# EAGLE board 4bit Logic Unit (EAGLE 8.4.3)
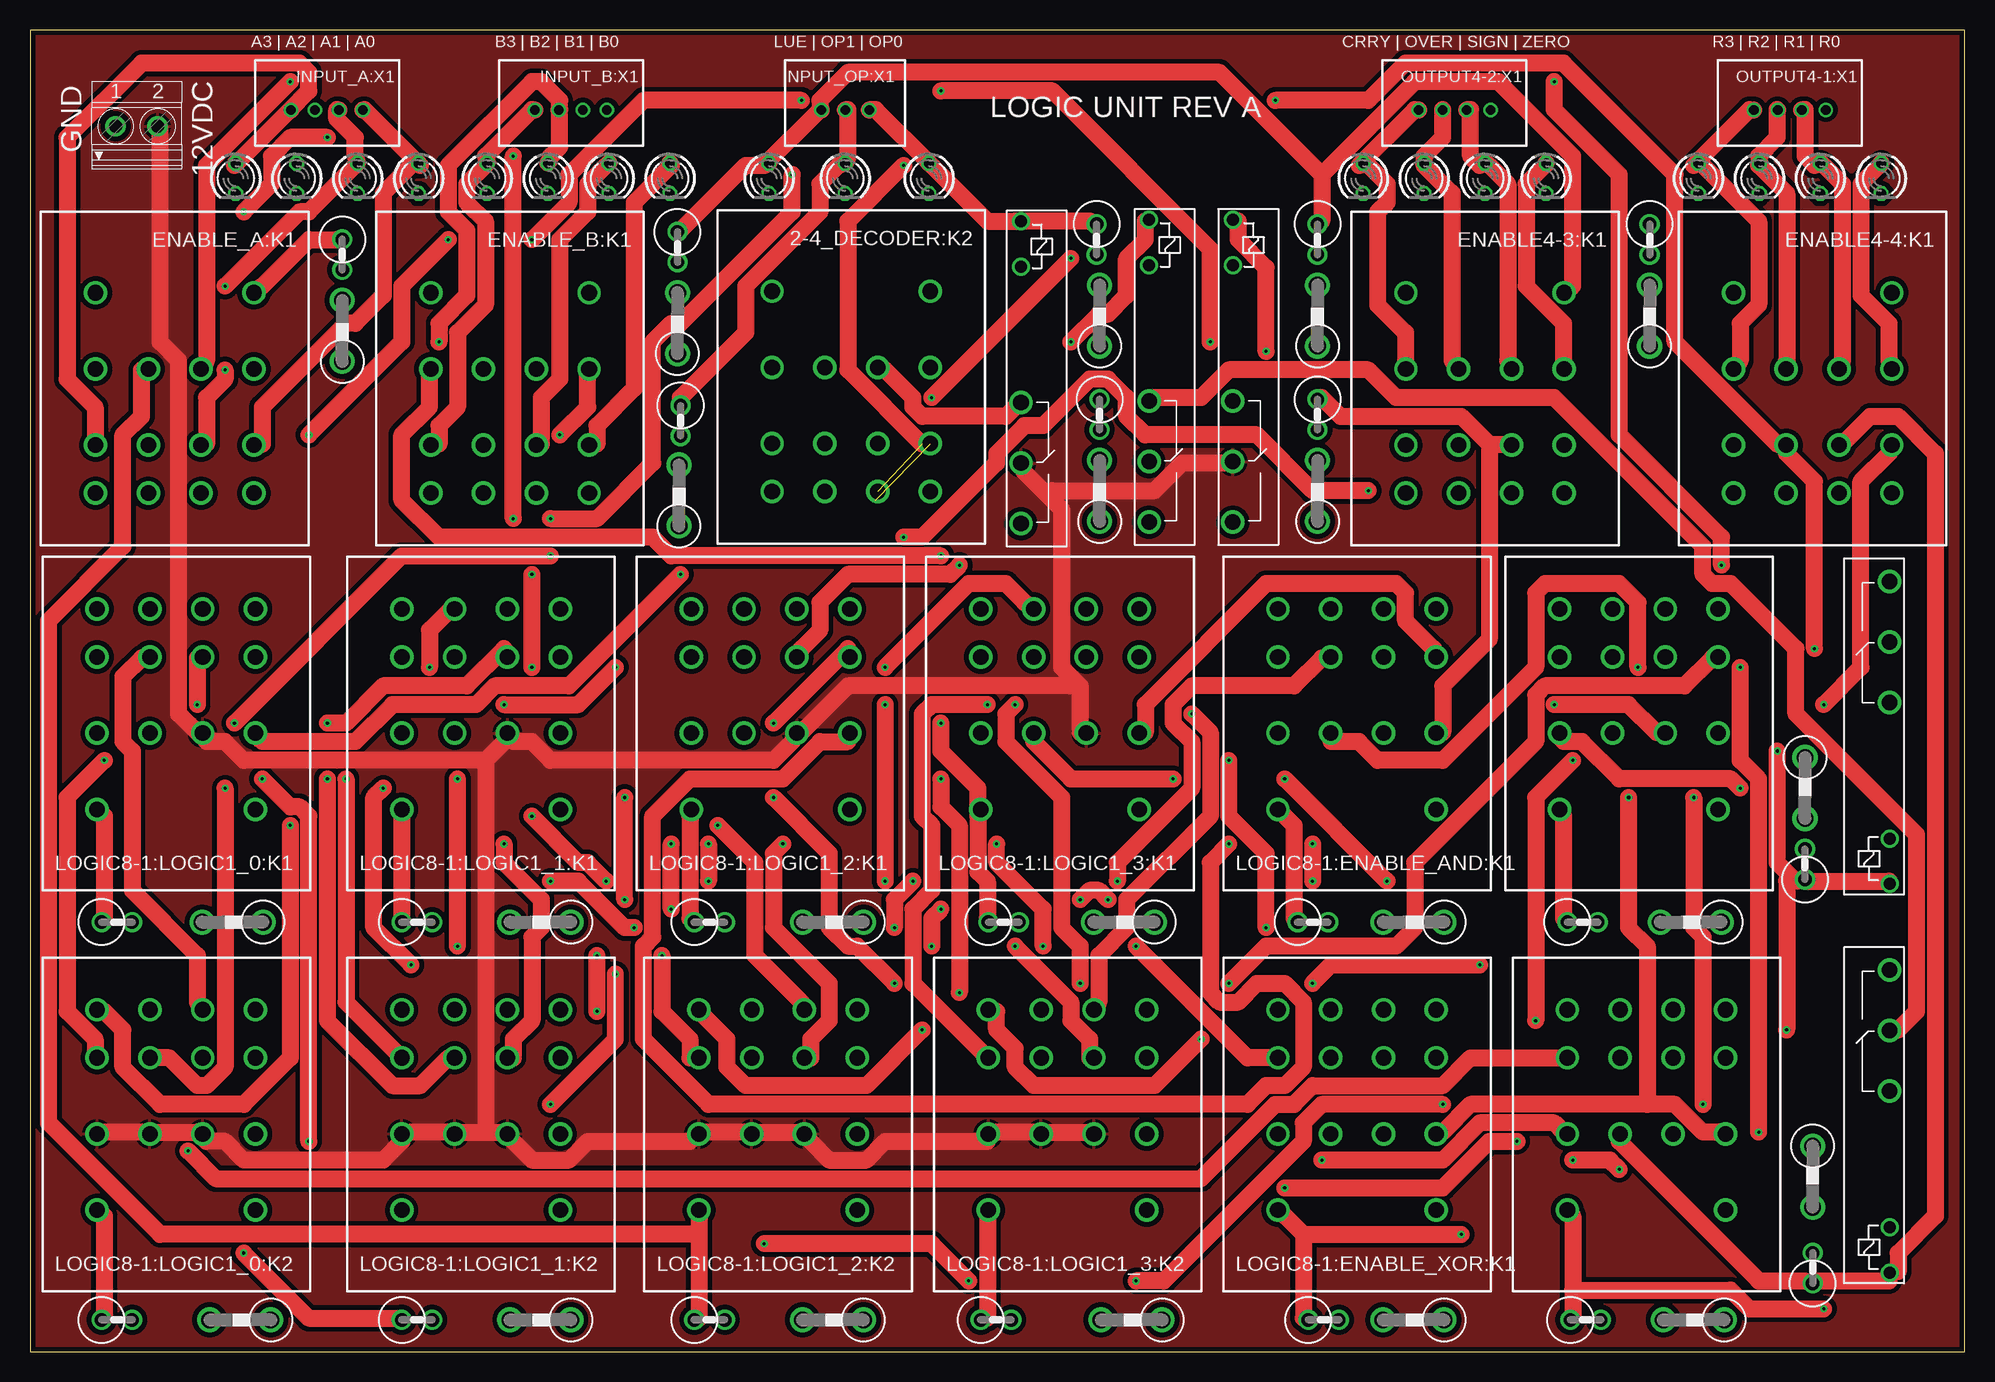
[diagram p0: board, top side]
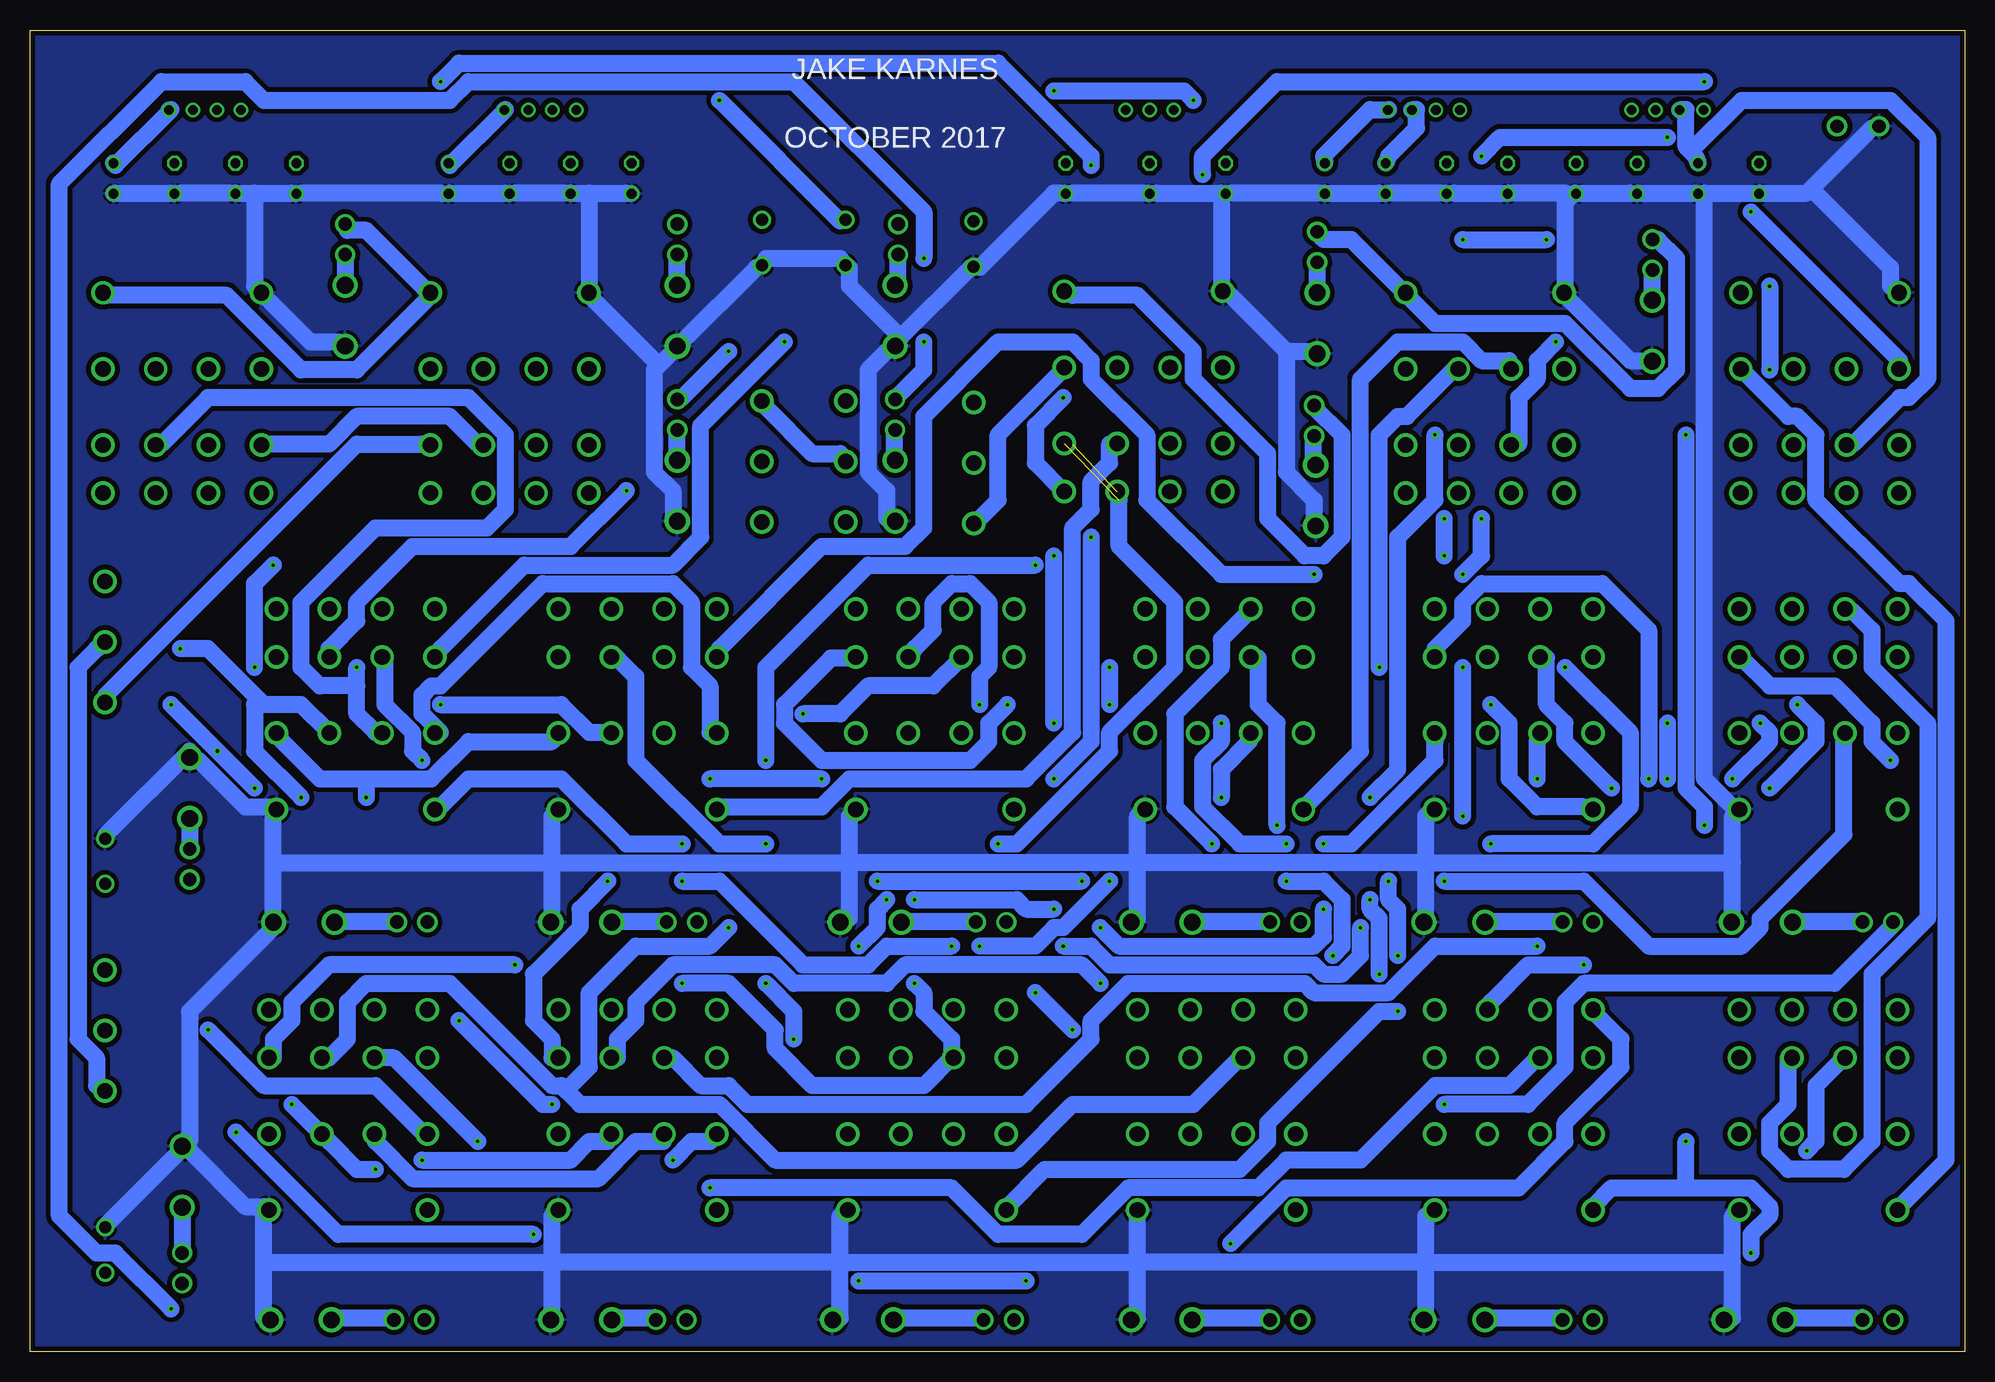
[diagram p1: board, bottom side, seen from below]

Size 161.27 x 110.16 mm. Coordinates in mm from the lower left corner, seen from the top.
Outline: 0,0 161.27,0 161.27,110.16 0,110.16 0,0
Copper layers (1*16): Top 0.07mm / dielectric 30mil / Bottom 0.07mm
Design rules "OSH_PARK_RULES_custom *": minimum track width 55mil, minimum drill 10mil, track to track 6mil, track to pad 6mil, pad to pad 6mil, via to via 6mil, smd to smd 6mil, copper to edge 15mil, drill to drill 6mil, minimum pad ring 7mil, minimum via ring 7mil, stop-mask expansion 3mil, vias tented up to drill 0mil, thermal gap 10mil

## Footprints (pad centres in the part's own frame; a part is rotated, then mirrored left to right if it is on the bottom)
RAD2,5 = drill 1.118: A 1.27,0; C -1.27,0
C1702-05 = drill 1.397: A 2.54,0; C -2.54,0
HF41F-12-Z = drill 1: 1 0.9,1.2; 2 4.68,1.2 | drill 1.3: 3 16.02,1.2; 4 21.06,1.2; 5 26.1,1.2
PY14-02 = drill 1.3: 11 6.6,6.35; 12 6.6,16.7; 14 6.6,12.7; 21 2.2,6.35; 22 2.2,16.7; 24 2.2,12.7; 31 -2.2,6.35; 32 -2.2,16.7; 34 -2.2,12.7; 41 -6.6,6.35; 42 -6.6,16.7; 44 -6.6,12.7; A1 6.6,0; A2 -6.6,0
LED3MM = drill 0.813 octagon: A -1.27,0; K 1.27,0
55932-0430 = drill 0.8: 1 3,0; 2 1,0; 3 -1,0; 4 -3,0
55932-0330 = drill 0.8: 1 2,0; 2 0,0; 3 -2,0
1751248 = drill 1.1 pad 1.7: 1 -1.75,-0.1; 2 1.75,-0.1

## Placement (x,y rotation side)
2-4_DECODER:D1  1N4007  [RAD2,5]  88.9,92.71 270 top
2-4_DECODER:D2  1N5359  [C1702-05]  89.15,86.36 90 top
2-4_DECODER:D3  1N4007  [RAD2,5]  54.23,77.6 270 top
2-4_DECODER:D4  1N5359  [C1702-05]  54.1,71.37 90 top
2-4_DECODER:K1  HF41F-12-Z  [HF41F-12-Z]  81.41,95.12 270 top
2-4_DECODER:K2  PY14-02  [PY14-02]  68.45,88.39 180 top
ENABLE4-3:D1  1N4007  [RAD2,5]  107.31,92.71 270 top
ENABLE4-3:D2  1N5359  [C1702-05]  107.31,86.36 90 top
ENABLE4-3:K1  PY14-02  [PY14-02]  121.28,88.27 180 top
ENABLE4-4:D1  1N4007  [RAD2,5]  135,92.71 270 top
ENABLE4-4:D2  1N5359  [C1702-05]  135,86.36 90 top
ENABLE4-4:K1  PY14-02  [PY14-02]  148.59,88.27 180 top
ENABLE_A:D1  1N4007  [RAD2,5]  26.04,91.44 270 top
ENABLE_A:D2  1N5359  [C1702-05]  26.04,85.09 90 top
ENABLE_A:K1  PY14-02  [PY14-02]  12.06,88.27 180 top
ENABLE_B:D1  1N4007  [RAD2,5]  53.98,92.08 270 top
ENABLE_B:D2  1N5359  [C1702-05]  53.98,85.72 90 top
ENABLE_B:K1  PY14-02  [PY14-02]  40.01,88.27 180 top
INPUT_A:LED0  [LED3MM]  32.38,97.79 270 top
INPUT_A:LED1  [LED3MM]  27.3,97.79 270 top
INPUT_A:LED2  [LED3MM]  22.23,97.79 270 top
INPUT_A:LED3  [LED3MM]  17.14,97.79 270 top
INPUT_A:X1  55932-0430  [55932-0430]  24.77,103.5 180 top
INPUT_B:LED0  [LED3MM]  53.34,97.79 270 top
INPUT_B:LED1  [LED3MM]  48.26,97.79 270 top
INPUT_B:LED2  [LED3MM]  43.18,97.79 270 top
INPUT_B:LED3  [LED3MM]  38.1,97.79 270 top
INPUT_B:X1  55932-0430  [55932-0430]  45.09,103.5 180 top
INPUT_OP:LED0  [LED3MM]  74.93,97.79 270 top
INPUT_OP:LED1  [LED3MM]  67.94,97.79 270 top
INPUT_OP:LED2  [LED3MM]  61.59,97.79 270 top
INPUT_OP:X1  55932-0330  [55932-0330]  67.94,103.5 180 top
LOGIC8-1:ENABLE_AND:D1  1N4007  [RAD2,5]  106.93,35.81 0 top
LOGIC8-1:ENABLE_AND:D2  1N5359  [C1702-05]  115.32,35.81 180 top
LOGIC8-1:ENABLE_AND:K1  PY14-02  [PY14-02]  110.62,45.21 0 top
LOGIC8-1:ENABLE_NOT:D1  1N4007  [RAD2,5]  129.41,35.81 0 top
LOGIC8-1:ENABLE_NOT:D2  1N5359  [C1702-05]  138.43,35.81 180 top
LOGIC8-1:ENABLE_NOT:K1  PY14-02  [PY14-02]  134.11,45.21 0 top
LOGIC8-1:ENABLE_OR:D1  1N4007  [RAD2,5]  129.67,2.67 0 top
LOGIC8-1:ENABLE_OR:D2  1N5359  [C1702-05]  138.68,2.67 180 top
LOGIC8-1:ENABLE_OR:K1  PY14-02  [PY14-02]  134.75,11.81 0 top
LOGIC8-1:ENABLE_XOR:D1  1N4007  [RAD2,5]  107.82,2.67 0 top
LOGIC8-1:ENABLE_XOR:D2  1N5359  [C1702-05]  115.32,2.67 180 top
LOGIC8-1:ENABLE_XOR:K1  PY14-02  [PY14-02]  110.62,11.81 0 top
LOGIC8-1:LOGIC1_0:D1  1N4007  [RAD2,5]  7.24,35.81 0 top
LOGIC8-1:LOGIC1_0:D2  1N5359  [C1702-05]  16.89,35.81 180 top
LOGIC8-1:LOGIC1_0:D3  1N4007  [RAD2,5]  7.24,2.67 0 top
LOGIC8-1:LOGIC1_0:D4  1N5359  [C1702-05]  17.53,2.67 180 top
LOGIC8-1:LOGIC1_0:K1  PY14-02  [PY14-02]  12.19,45.21 0 top
LOGIC8-1:LOGIC1_0:K2  PY14-02  [PY14-02]  12.19,11.81 0 top
LOGIC8-1:LOGIC1_1:D1  1N4007  [RAD2,5]  32.26,35.81 0 top
LOGIC8-1:LOGIC1_1:D2  1N5359  [C1702-05]  42.55,35.81 180 top
LOGIC8-1:LOGIC1_1:D3  1N4007  [RAD2,5]  32.26,2.67 0 top
LOGIC8-1:LOGIC1_1:D4  1N5359  [C1702-05]  42.55,2.67 180 top
LOGIC8-1:LOGIC1_1:K1  PY14-02  [PY14-02]  37.59,45.21 0 top
LOGIC8-1:LOGIC1_1:K2  PY14-02  [PY14-02]  37.59,11.81 0 top
LOGIC8-1:LOGIC1_2:D1  1N4007  [RAD2,5]  56.64,35.81 0 top
LOGIC8-1:LOGIC1_2:D2  1N5359  [C1702-05]  66.93,35.81 180 top
LOGIC8-1:LOGIC1_2:D3  1N4007  [RAD2,5]  56.64,2.67 0 top
LOGIC8-1:LOGIC1_2:D4  1N5359  [C1702-05]  66.93,2.67 180 top
LOGIC8-1:LOGIC1_2:K1  PY14-02  [PY14-02]  61.72,45.21 0 top
LOGIC8-1:LOGIC1_2:K2  PY14-02  [PY14-02]  62.36,11.81 0 top
LOGIC8-1:LOGIC1_3:D1  1N4007  [RAD2,5]  81.15,35.81 0 top
LOGIC8-1:LOGIC1_3:D2  1N5359  [C1702-05]  91.19,35.81 180 top
LOGIC8-1:LOGIC1_3:D3  1N4007  [RAD2,5]  80.52,2.67 0 top
LOGIC8-1:LOGIC1_3:D4  1N5359  [C1702-05]  91.82,2.67 180 top
LOGIC8-1:LOGIC1_3:K1  PY14-02  [PY14-02]  85.85,45.21 0 top
LOGIC8-1:LOGIC1_3:K2  PY14-02  [PY14-02]  86.49,11.81 0 top
OUTPUT4-1:LED0  [LED3MM]  154.31,97.79 270 top
OUTPUT4-1:LED1  [LED3MM]  149.22,97.79 270 top
OUTPUT4-1:LED2  [LED3MM]  144.15,97.79 270 top
OUTPUT4-1:LED3  [LED3MM]  139.06,97.79 270 top
OUTPUT4-1:X1  55932-0430  [55932-0430]  146.69,103.5 180 top
OUTPUT4-2:LED0  [LED3MM]  126.36,97.79 270 top
OUTPUT4-2:LED1  [LED3MM]  121.28,97.79 270 top
OUTPUT4-2:LED2  [LED3MM]  116.2,97.79 270 top
OUTPUT4-2:LED3  [LED3MM]  111.12,97.79 270 top
OUTPUT4-2:X1  55932-0430  [55932-0430]  118.75,103.5 180 top
PWR_BLK:PWR  PWR_BLK  [1751248]  8.89,102.23 0 top
ZERO_DETECT1:D1  1N4007  [RAD2,5]  107.31,78.1 270 top
ZERO_DETECT1:D2  1N5359  [C1702-05]  107.31,71.75 90 top
ZERO_DETECT1:D3  1N4007  [RAD2,5]  89.15,78.1 270 top
ZERO_DETECT1:D4  1N5359  [C1702-05]  89.15,71.75 90 top
ZERO_DETECT1:D5  1N4007  [RAD2,5]  148.59,6.98 90 top
ZERO_DETECT1:D6  1N5359  [C1702-05]  148.59,14.61 270 top
ZERO_DETECT1:D7  1N4007  [RAD2,5]  147.96,40.64 90 top
ZERO_DETECT1:D8  1N5359  [C1702-05]  147.96,46.99 270 top
ZERO_DETECT1:K1  HF41F-12-Z  [HF41F-12-Z]  99.06,95.25 270 top
ZERO_DETECT1:K2  HF41F-12-Z  [HF41F-12-Z]  92.08,95.25 270 top
ZERO_DETECT1:K3  HF41F-12-Z  [HF41F-12-Z]  156.21,5.71 90 top
ZERO_DETECT1:K4  HF41F-12-Z  [HF41F-12-Z]  156.21,38.1 90 top

## Library data of the parts
2-4_DECODER:D1-2-4_DECODER:D4 2-4_DECODER:K1 2-4_DECODER:K2 ENABLE4-3:D1 ENABLE4-3:D2 ENABLE4-3:K1 ENABLE4-4:D1 ENABLE4-4:D2 ENABLE4-4:K1 ENABLE_A:D1 ENABLE_A:D2 ENABLE_A:K1 ENABLE_B:D1 ENABLE_B:D2 ENABLE_B:K1 INPUT_A:LED0 INPUT_A:LED1-INPUT_A:LED3 INPUT_A:X1 INPUT_B:LED0 INPUT_B:LED1-INPUT_B:LED3 INPUT_B:X1 INPUT_OP:LED0 INPUT_OP:LED1 INPUT_OP:LED2 INPUT_OP:X1 LOGIC8-1:ENABLE_AND:D1 LOGIC8-1:ENABLE_AND:D2 LOGIC8-1:ENABLE_AND:K1 LOGIC8-1:ENABLE_NOT:D1 LOGIC8-1:ENABLE_NOT:D2 LOGIC8-1:ENABLE_NOT:K1 LOGIC8-1:ENABLE_OR:D1 LOGIC8-1:ENABLE_OR:D2 LOGIC8-1:ENABLE_OR:K1 LOGIC8-1:ENABLE_XOR:D1 LOGIC8-1:ENABLE_XOR:D2 LOGIC8-1:ENABLE_XOR:K1 LOGIC8-1:LOGIC1_0:D1-LOGIC8-1:LOGIC1_0:D4 LOGIC8-1:LOGIC1_0:K1 LOGIC8-1:LOGIC1_0:K2 LOGIC8-1:LOGIC1_1:D1-LOGIC8-1:LOGIC1_1:D4 LOGIC8-1:LOGIC1_1:K1 LOGIC8-1:LOGIC1_1:K2 LOGIC8-1:LOGIC1_2:D1-LOGIC8-1:LOGIC1_2:D4 LOGIC8-1:LOGIC1_2:K1 LOGIC8-1:LOGIC1_2:K2 LOGIC8-1:LOGIC1_3:D1-LOGIC8-1:LOGIC1_3:D4 LOGIC8-1:LOGIC1_3:K1 LOGIC8-1:LOGIC1_3:K2 OUTPUT4-1:LED0 OUTPUT4-1:LED1-OUTPUT4-1:LED3 OUTPUT4-1:X1 OUTPUT4-2:LED0 OUTPUT4-2:LED1-OUTPUT4-2:LED3 OUTPUT4-2:X1 ZERO_DETECT1:D1-ZERO_DETECT1:D8 ZERO_DETECT1:K1-ZERO_DETECT1:K4 = relay_computer_custom
PWR_BLK:PWR = relay_computer_custom; OC_FARNELL: unknown; OC_NEWARK: unknown

## Nets
2-4_DECODER:D$1: 2-4_DECODER:D1.A 2-4_DECODER:D2.A
2-4_DECODER:D$2: 2-4_DECODER:D3.A 2-4_DECODER:D4.A
2-4_DECODER:N$1: 2-4_DECODER:K1.5 2-4_DECODER:K2.41
2-4_DECODER:N$2: 2-4_DECODER:K1.3 2-4_DECODER:K2.31
+12V: 2-4_DECODER:K1.4 LOGIC8-1:LOGIC1_0:K1.21 LOGIC8-1:LOGIC1_0:K2.21 LOGIC8-1:LOGIC1_0:K2.31 LOGIC8-1:LOGIC1_0:K2.41 LOGIC8-1:LOGIC1_1:K1.21 LOGIC8-1:LOGIC1_1:K2.21 LOGIC8-1:LOGIC1_1:K2.31 LOGIC8-1:LOGIC1_1:K2.41 LOGIC8-1:LOGIC1_2:K1.21 LOGIC8-1:LOGIC1_2:K2.21 LOGIC8-1:LOGIC1_2:K2.31 LOGIC8-1:LOGIC1_2:K2.41 LOGIC8-1:LOGIC1_3:K1.21 LOGIC8-1:LOGIC1_3:K2.21 LOGIC8-1:LOGIC1_3:K2.31 LOGIC8-1:LOGIC1_3:K2.41 PWR_BLK:PWR.2 ZERO_DETECT1:K1.4
CARRY: ENABLE4-3:K1.11 OUTPUT4-2:LED3.A OUTPUT4-2:X1.1
ENABLE4-3:D$1: ENABLE4-3:D1.A ENABLE4-3:D2.A
ENABLE4-3:IN2: ENABLE4-3:K1.24
ENABLE4-3:IN3: ENABLE4-3:K1.14
ENABLE4-4:D$1: ENABLE4-4:D1.A ENABLE4-4:D2.A
ENABLE_A:D$1: ENABLE_A:D1.A ENABLE_A:D2.A
ENABLE_B:D$1: ENABLE_B:D1.A ENABLE_B:D2.A
GND: 2-4_DECODER:D2.C 2-4_DECODER:D4.C 2-4_DECODER:K1.2 2-4_DECODER:K2.A1 ENABLE4-3:D2.C ENABLE4-3:K1.A1 ENABLE4-4:D2.C ENABLE4-4:K1.A1 ENABLE_A:D2.C ENABLE_A:K1.A1 ENABLE_B:D2.C ENABLE_B:K1.A1 INPUT_A:LED0.K INPUT_A:LED1.K INPUT_A:LED2.K INPUT_A:LED3.K INPUT_B:LED0.K INPUT_B:LED1.K INPUT_B:LED2.K INPUT_B:LED3.K INPUT_OP:LED0.K INPUT_OP:LED1.K INPUT_OP:LED2.K LOGIC8-1:ENABLE_AND:D2.C LOGIC8-1:ENABLE_AND:K1.A1 LOGIC8-1:ENABLE_NOT:D2.C LOGIC8-1:ENABLE_NOT:K1.A1 LOGIC8-1:ENABLE_OR:D2.C LOGIC8-1:ENABLE_OR:K1.A1 LOGIC8-1:ENABLE_XOR:D2.C LOGIC8-1:ENABLE_XOR:K1.A1 LOGIC8-1:LOGIC1_0:D2.C LOGIC8-1:LOGIC1_0:D4.C LOGIC8-1:LOGIC1_0:K1.A1 LOGIC8-1:LOGIC1_0:K2.A1 LOGIC8-1:LOGIC1_1:D2.C LOGIC8-1:LOGIC1_1:D4.C LOGIC8-1:LOGIC1_1:K1.A1 LOGIC8-1:LOGIC1_1:K2.A1 LOGIC8-1:LOGIC1_2:D2.C LOGIC8-1:LOGIC1_2:D4.C LOGIC8-1:LOGIC1_2:K1.A1 LOGIC8-1:LOGIC1_2:K2.A1 LOGIC8-1:LOGIC1_3:D2.C LOGIC8-1:LOGIC1_3:D4.C LOGIC8-1:LOGIC1_3:K1.A1 LOGIC8-1:LOGIC1_3:K2.A1 OUTPUT4-1:LED0.K OUTPUT4-1:LED1.K OUTPUT4-1:LED2.K OUTPUT4-1:LED3.K OUTPUT4-2:LED0.K OUTPUT4-2:LED1.K OUTPUT4-2:LED2.K OUTPUT4-2:LED3.K PWR_BLK:PWR.1 ZERO_DETECT1:D2.C ZERO_DETECT1:D4.C ZERO_DETECT1:D6.C ZERO_DETECT1:D8.C ZERO_DETECT1:K1.2 ZERO_DETECT1:K2.2 ZERO_DETECT1:K3.2 ZERO_DETECT1:K4.2
LOGIC8-1:AND0: LOGIC8-1:ENABLE_AND:K1.44 LOGIC8-1:LOGIC1_0:K1.11
LOGIC8-1:AND1: LOGIC8-1:ENABLE_AND:K1.34 LOGIC8-1:LOGIC1_1:K1.11
LOGIC8-1:AND2: LOGIC8-1:ENABLE_AND:K1.24 LOGIC8-1:LOGIC1_2:K1.11
LOGIC8-1:AND3: LOGIC8-1:ENABLE_AND:K1.14 LOGIC8-1:LOGIC1_3:K1.11
LOGIC8-1:ENABLE_AND:D$1: LOGIC8-1:ENABLE_AND:D1.A LOGIC8-1:ENABLE_AND:D2.A
LOGIC8-1:ENABLE_NOT:D$1: LOGIC8-1:ENABLE_NOT:D1.A LOGIC8-1:ENABLE_NOT:D2.A
LOGIC8-1:ENABLE_OR:D$1: LOGIC8-1:ENABLE_OR:D1.A LOGIC8-1:ENABLE_OR:D2.A
LOGIC8-1:ENABLE_XOR:D$1: LOGIC8-1:ENABLE_XOR:D1.A LOGIC8-1:ENABLE_XOR:D2.A
LOGIC8-1:LOGIC1_0:D$1: LOGIC8-1:LOGIC1_0:D1.A LOGIC8-1:LOGIC1_0:D2.A
LOGIC8-1:LOGIC1_0:D$2: LOGIC8-1:LOGIC1_0:D3.A LOGIC8-1:LOGIC1_0:D4.A
LOGIC8-1:LOGIC1_0:N$1: LOGIC8-1:LOGIC1_0:K1.14 LOGIC8-1:LOGIC1_0:K2.44
LOGIC8-1:LOGIC1_0:N$3: LOGIC8-1:LOGIC1_0:K1.32 LOGIC8-1:LOGIC1_0:K2.24
LOGIC8-1:LOGIC1_0:N$4: LOGIC8-1:LOGIC1_0:K1.34 LOGIC8-1:LOGIC1_0:K2.22
LOGIC8-1:LOGIC1_1:D$1: LOGIC8-1:LOGIC1_1:D1.A LOGIC8-1:LOGIC1_1:D2.A
LOGIC8-1:LOGIC1_1:D$2: LOGIC8-1:LOGIC1_1:D3.A LOGIC8-1:LOGIC1_1:D4.A
LOGIC8-1:LOGIC1_1:N$1: LOGIC8-1:LOGIC1_1:K1.14 LOGIC8-1:LOGIC1_1:K2.44
LOGIC8-1:LOGIC1_1:N$3: LOGIC8-1:LOGIC1_1:K1.32 LOGIC8-1:LOGIC1_1:K2.24
LOGIC8-1:LOGIC1_1:N$4: LOGIC8-1:LOGIC1_1:K1.34 LOGIC8-1:LOGIC1_1:K2.22
LOGIC8-1:LOGIC1_2:D$1: LOGIC8-1:LOGIC1_2:D1.A LOGIC8-1:LOGIC1_2:D2.A
LOGIC8-1:LOGIC1_2:D$2: LOGIC8-1:LOGIC1_2:D3.A LOGIC8-1:LOGIC1_2:D4.A
LOGIC8-1:LOGIC1_2:N$1: LOGIC8-1:LOGIC1_2:K1.14 LOGIC8-1:LOGIC1_2:K2.44
LOGIC8-1:LOGIC1_2:N$3: LOGIC8-1:LOGIC1_2:K1.32 LOGIC8-1:LOGIC1_2:K2.24
LOGIC8-1:LOGIC1_2:N$4: LOGIC8-1:LOGIC1_2:K1.34 LOGIC8-1:LOGIC1_2:K2.22
LOGIC8-1:LOGIC1_3:D$1: LOGIC8-1:LOGIC1_3:D1.A LOGIC8-1:LOGIC1_3:D2.A
LOGIC8-1:LOGIC1_3:D$2: LOGIC8-1:LOGIC1_3:D3.A LOGIC8-1:LOGIC1_3:D4.A
LOGIC8-1:LOGIC1_3:N$1: LOGIC8-1:LOGIC1_3:K1.14 LOGIC8-1:LOGIC1_3:K2.44
LOGIC8-1:LOGIC1_3:N$3: LOGIC8-1:LOGIC1_3:K1.32 LOGIC8-1:LOGIC1_3:K2.24
LOGIC8-1:LOGIC1_3:N$4: LOGIC8-1:LOGIC1_3:K1.34 LOGIC8-1:LOGIC1_3:K2.22
LOGIC8-1:NOT0: LOGIC8-1:ENABLE_NOT:K1.44 LOGIC8-1:LOGIC1_0:K2.42
LOGIC8-1:NOT1: LOGIC8-1:ENABLE_NOT:K1.34 LOGIC8-1:LOGIC1_1:K2.42
LOGIC8-1:NOT2: LOGIC8-1:ENABLE_NOT:K1.24 LOGIC8-1:LOGIC1_2:K2.42
LOGIC8-1:NOT3: LOGIC8-1:ENABLE_NOT:K1.14 LOGIC8-1:LOGIC1_3:K2.42
LOGIC8-1:OR0: LOGIC8-1:ENABLE_OR:K1.44 LOGIC8-1:LOGIC1_0:K1.24 LOGIC8-1:LOGIC1_0:K2.34
LOGIC8-1:OR1: LOGIC8-1:ENABLE_OR:K1.34 LOGIC8-1:LOGIC1_1:K1.24 LOGIC8-1:LOGIC1_1:K2.34
LOGIC8-1:OR2: LOGIC8-1:ENABLE_OR:K1.24 LOGIC8-1:LOGIC1_2:K1.24 LOGIC8-1:LOGIC1_2:K2.34
LOGIC8-1:OR3: LOGIC8-1:ENABLE_OR:K1.14 LOGIC8-1:LOGIC1_3:K1.24 LOGIC8-1:LOGIC1_3:K2.34
LOGIC8-1:XOR0: LOGIC8-1:ENABLE_XOR:K1.44 LOGIC8-1:LOGIC1_0:K1.31
LOGIC8-1:XOR1: LOGIC8-1:ENABLE_XOR:K1.34 LOGIC8-1:LOGIC1_1:K1.31
LOGIC8-1:XOR2: LOGIC8-1:ENABLE_XOR:K1.24 LOGIC8-1:LOGIC1_2:K1.31
LOGIC8-1:XOR3: LOGIC8-1:ENABLE_XOR:K1.14 LOGIC8-1:LOGIC1_3:K1.31
LUE: ENABLE4-3:D1.C ENABLE4-3:K1.A2 ENABLE4-4:D1.C ENABLE4-4:K1.A2 ENABLE_A:D1.C ENABLE_A:K1.A2 ENABLE_B:D1.C ENABLE_B:K1.A2 INPUT_OP:LED2.A INPUT_OP:X1.1
N$1: ENABLE_A:K1.44 INPUT_A:LED0.A INPUT_A:X1.4
N$2: ENABLE_A:K1.34 INPUT_A:LED1.A INPUT_A:X1.3
N$3: ENABLE_A:K1.24 INPUT_A:LED2.A INPUT_A:X1.2
N$4: ENABLE_A:K1.14 INPUT_A:LED3.A INPUT_A:X1.1
N$5: ENABLE_B:K1.44 INPUT_B:LED0.A INPUT_B:X1.4
N$6: ENABLE_B:K1.34 INPUT_B:LED1.A INPUT_B:X1.3
N$7: ENABLE_B:K1.24 INPUT_B:LED2.A INPUT_B:X1.2
N$8: ENABLE_B:K1.14 INPUT_B:LED3.A INPUT_B:X1.1
N$9: ENABLE_B:K1.11 LOGIC8-1:LOGIC1_3:D1.C LOGIC8-1:LOGIC1_3:K1.A2
N$10: ENABLE_B:K1.21 LOGIC8-1:LOGIC1_2:D1.C LOGIC8-1:LOGIC1_2:K1.A2
N$11: ENABLE_B:K1.31 LOGIC8-1:LOGIC1_1:D1.C LOGIC8-1:LOGIC1_1:K1.A2
N$12: ENABLE_B:K1.41 LOGIC8-1:LOGIC1_0:D1.C LOGIC8-1:LOGIC1_0:K1.A2
N$13: 2-4_DECODER:D1.C 2-4_DECODER:K1.1 INPUT_OP:LED0.A INPUT_OP:X1.3
N$14: ENABLE_A:K1.11 LOGIC8-1:LOGIC1_3:D3.C LOGIC8-1:LOGIC1_3:K2.A2
N$15: ENABLE_A:K1.21 LOGIC8-1:LOGIC1_2:D3.C LOGIC8-1:LOGIC1_2:K2.A2
N$16: ENABLE_A:K1.31 LOGIC8-1:LOGIC1_1:D3.C LOGIC8-1:LOGIC1_1:K2.A2
N$17: ENABLE_A:K1.41 LOGIC8-1:LOGIC1_0:D3.C LOGIC8-1:LOGIC1_0:K2.A2
N$18: 2-4_DECODER:D3.C 2-4_DECODER:K2.A2 INPUT_OP:LED1.A INPUT_OP:X1.2
N$19: 2-4_DECODER:K2.44 LOGIC8-1:ENABLE_NOT:D1.C LOGIC8-1:ENABLE_NOT:K1.A2
N$20: 2-4_DECODER:K2.34 LOGIC8-1:ENABLE_AND:D1.C LOGIC8-1:ENABLE_AND:K1.A2
N$21: 2-4_DECODER:K2.42 LOGIC8-1:ENABLE_OR:D1.C LOGIC8-1:ENABLE_OR:K1.A2
N$22: 2-4_DECODER:K2.32 LOGIC8-1:ENABLE_XOR:D1.C LOGIC8-1:ENABLE_XOR:K1.A2
N$26: ENABLE4-3:K1.44 ZERO_DETECT1:K4.3
N$40: ENABLE4-4:K1.44 LOGIC8-1:ENABLE_AND:K1.41 LOGIC8-1:ENABLE_NOT:K1.41 LOGIC8-1:ENABLE_OR:K1.41 LOGIC8-1:ENABLE_XOR:K1.41 ZERO_DETECT1:D7.C ZERO_DETECT1:K4.1
N$41: ENABLE4-4:K1.34 LOGIC8-1:ENABLE_AND:K1.31 LOGIC8-1:ENABLE_NOT:K1.31 LOGIC8-1:ENABLE_OR:K1.31 LOGIC8-1:ENABLE_XOR:K1.31 ZERO_DETECT1:D5.C ZERO_DETECT1:K3.1
N$42: ENABLE4-4:K1.24 LOGIC8-1:ENABLE_AND:K1.21 LOGIC8-1:ENABLE_NOT:K1.21 LOGIC8-1:ENABLE_OR:K1.21 LOGIC8-1:ENABLE_XOR:K1.21 ZERO_DETECT1:D3.C ZERO_DETECT1:K2.1
N$43: ENABLE4-3:K1.34 ENABLE4-4:K1.14 LOGIC8-1:ENABLE_AND:K1.11 LOGIC8-1:ENABLE_NOT:K1.11 LOGIC8-1:ENABLE_OR:K1.11 LOGIC8-1:ENABLE_XOR:K1.11 ZERO_DETECT1:D1.C ZERO_DETECT1:K1.1
OVERFLOW: ENABLE4-3:K1.21 OUTPUT4-2:LED2.A OUTPUT4-2:X1.2
R0: ENABLE4-4:K1.41 OUTPUT4-1:LED0.A OUTPUT4-1:X1.4
R1: ENABLE4-4:K1.31 OUTPUT4-1:LED1.A OUTPUT4-1:X1.3
R2: ENABLE4-4:K1.21 OUTPUT4-1:LED2.A OUTPUT4-1:X1.2
R3: ENABLE4-4:K1.11 OUTPUT4-1:LED3.A OUTPUT4-1:X1.1
SIGN: ENABLE4-3:K1.31 OUTPUT4-2:LED1.A OUTPUT4-2:X1.3
ZERO: ENABLE4-3:K1.41 OUTPUT4-2:LED0.A OUTPUT4-2:X1.4
ZERO_DETECT1:D$1: ZERO_DETECT1:D1.A ZERO_DETECT1:D2.A
ZERO_DETECT1:D$2: ZERO_DETECT1:D3.A ZERO_DETECT1:D4.A
ZERO_DETECT1:D$3: ZERO_DETECT1:D5.A ZERO_DETECT1:D6.A
ZERO_DETECT1:D$4: ZERO_DETECT1:D7.A ZERO_DETECT1:D8.A
ZERO_DETECT1:N$2: ZERO_DETECT1:K1.3 ZERO_DETECT1:K2.4
ZERO_DETECT1:N$3: ZERO_DETECT1:K2.3 ZERO_DETECT1:K3.4
ZERO_DETECT1:N$4: ZERO_DETECT1:K3.3 ZERO_DETECT1:K4.4

## Tracks (layer width: path | path; a pad name or v marks a point on that pad's centre or on a via)
2-4_DECODER:D$1
  Bottom 1.397: 2-4_DECODER:D1.A 88.9,88.9 2-4_DECODER:D2.A
2-4_DECODER:D$2
  Bottom 1.397: 2-4_DECODER:D3.A 54.29,76.2 54.29,73.98 2-4_DECODER:D4.A
2-4_DECODER:N$1
  Bottom 1.397: 2-4_DECODER:K2.41 75.15,81.84 80.57,76.42 80.57,70.99 82.12,69.44 2-4_DECODER:K1.5
2-4_DECODER:N$2
  Top 1.397: 2-4_DECODER:K2.31 71.27,81.84 73.6,79.52 73.6,78.74 74.37,77.96 81.34,77.96 82.12,78.74 2-4_DECODER:K1.3
+12V
  Top 1.397: LOGIC8-1:LOGIC1_3:K2.21 88.32,18.31 84.44,18.31 LOGIC8-1:LOGIC1_3:K2.31 83.67,18.31 80.57,18.31 LOGIC8-1:LOGIC1_3:K2.41 79.79,17.54 71.27,17.54 69.72,15.99 66.62,15.99 65.08,17.54 LOGIC8-1:LOGIC1_2:K2.21 64.3,18.31 60.43,18.31 LOGIC8-1:LOGIC1_2:K2.31 59.65,18.31 55.78,18.31 LOGIC8-1:LOGIC1_2:K2.41 55,17.54 46.48,17.54 44.93,15.99 41.83,15.99 40.28,17.54 LOGIC8-1:LOGIC1_1:K2.21 39.51,18.31 37.96,18.31 | LOGIC8-1:LOGIC1_0:K2.41 6.2,18.31 9.3,18.31 LOGIC8-1:LOGIC1_0:K2.31 10.07,18.31 13.95,18.31 LOGIC8-1:LOGIC1_0:K2.21 14.72,17.54 16.27,17.54 17.82,15.99 29.44,15.99 30.99,17.54 LOGIC8-1:LOGIC1_1:K2.41 31.76,18.31 34.86,18.31 LOGIC8-1:LOGIC1_1:K2.31 35.64,18.31 37.96,18.31 | PWR_BLK:PWR.2 10.85,101.98 10.85,84.16 12.39,82.61 12.39,53.18 13.95,51.62 LOGIC8-1:LOGIC1_0:K1.21 14.72,50.85 16.27,50.85 17.82,49.3 37.96,49.3 | 87.15,55.89 85.99,57.05 85.99,70.22 84.83,71.38 | 87.15,55.89 87.54,55.5 87.54,51.62 LOGIC8-1:LOGIC1_3:K1.21 | 84.83,71.38 82.89,73.32 2-4_DECODER:K1.4 | ZERO_DETECT1:K1.4 99.94,74.09 96.06,74.09 93.74,71.77 85.22,71.77 84.83,71.38 | 87.15,55.89 86.77,55.5 68.17,55.5 64.3,51.62 LOGIC8-1:LOGIC1_2:K1.21 63.52,50.85 61.98,49.3 43.38,49.3 41.83,50.85 40.28,50.85 LOGIC8-1:LOGIC1_1:K1.21 39.51,50.85 37.96,49.3 | 37.96,49.3 37.96,18.31
  pour Top (isolate 0.406): 0,110.49 161.29,110.49 161.29,0 0,0
CARRY
  Top 1.397: OUTPUT4-2:X1.1 115.43,103.53 110.78,98.88 OUTPUT4-2:LED3.A 111.56,98.88 113.11,97.33 113.11,95.78 112.33,95.01 112.33,87.26 114.66,84.94 114.66,82.61 ENABLE4-3:K1.11
ENABLE4-3:D$1
  Bottom 1.397: ENABLE4-3:D2.A ENABLE4-3:D1.A
ENABLE4-4:D$1
  Bottom 1.397: ENABLE4-4:D1.A 134.94,91.44 134.94,88.9 ENABLE4-4:D2.A
ENABLE_A:D$1
  Bottom 1.397: ENABLE_A:D2.A ENABLE_A:D1.A
ENABLE_B:D$1
  Bottom 1.397: ENABLE_B:D2.A ENABLE_B:D1.A
GND
  Bottom 1.397: 88.7,84.55 89.09,84.16 2-4_DECODER:D2.C 89.86,83.39 91.42,81.84 91.42,73.32 89.86,71.77 89.86,69.44 ZERO_DETECT1:D4.C | 88.7,84.55 82.89,90.36 2-4_DECODER:K1.2 82.12,90.36 75.92,96.56 75.15,96.56 INPUT_OP:LED0.K 74.37,96.56 68.17,96.56 INPUT_OP:LED1.K 67.4,96.56 61.98,96.56 | 88.7,84.55 92.96,88.81 92.96,90.36 ZERO_DETECT1:K2.2 93.74,91.13 99.94,91.13 ZERO_DETECT1:K1.2 100.71,90.36 106.91,84.16 ENABLE4-3:D2.C 107.68,83.39 108.84,82.23 | OUTPUT4-1:LED0.K 154.16,96.56 149.52,96.56 OUTPUT4-1:LED1.K 148.74,96.56 144.09,96.56 | 144.09,96.56 142.54,96.56 | 142.54,96.56 139.45,96.56 OUTPUT4-1:LED3.K 138.67,96.56 127.05,96.56 OUTPUT4-2:LED0.K 126.28,96.56 121.63,96.56 OUTPUT4-2:LED1.K 120.85,96.56 116.2,96.56 | 142.54,96.56 142.54,88.81 ENABLE4-4:K1.A1 141.77,88.04 137.9,84.16 135.57,84.16 ENABLE4-4:D2.C | 144.09,96.56 OUTPUT4-1:LED2.K | 108.84,82.23 109.23,81.84 109.23,73.32 107.68,71.77 107.68,69.44 ZERO_DETECT1:D2.C | 116.2,96.56 114.66,96.56 | 114.66,96.56 111.56,96.56 OUTPUT4-2:LED3.K | 114.66,96.56 114.66,88.81 ENABLE4-3:K1.A1 114.66,88.04 108.84,82.23 | 116.2,96.56 OUTPUT4-2:LED2.K | 61.98,96.56 61.98,88.81 2-4_DECODER:K2.A1 61.2,88.04 56.55,83.39 | 61.98,96.56 INPUT_OP:LED2.K 61.2,96.56 53.45,96.56 | 56.55,83.39 54.23,83.39 ENABLE_B:D2.C | 56.55,83.39 56.55,73.32 54.23,70.99 54.23,69.44 2-4_DECODER:D4.C | 21.69,96.56 17.04,96.56 | 12.78,96.94 13.17,96.56 17.04,96.56 | 12.78,96.94 7.75,101.98 PWR_BLK:PWR.1 | 17.04,96.56 INPUT_A:LED3.K | 12.78,96.94 6.2,90.36 6.2,88.81 ENABLE_A:K1.A1 | 53.45,96.56 48.81,96.56 INPUT_B:LED1.K 48.03,96.56 43.38,96.56 INPUT_B:LED2.K 42.61,96.56 37.96,96.56
  Bottom 1.397: 32.54,96.56 27.89,96.56 INPUT_A:LED1.K 27.11,96.56 22.47,96.56 INPUT_A:LED2.K 21.69,96.56 | 32.54,96.56 32.92,96.17 | 32.92,96.17 33.31,95.78 33.31,88.81 ENABLE_B:K1.A1 33.31,88.04 27.89,82.61 26.34,82.61 ENABLE_A:D2.C | 32.54,96.56 INPUT_A:LED0.K | 37.96,96.56 33.31,96.56 32.92,96.17 | 37.96,96.56 INPUT_B:LED3.K | 53.45,96.56 INPUT_B:LED0.K | 92.96,40.78 92.96,36.13 LOGIC8-1:LOGIC1_3:D2.C | 92.96,40.78 92.96,44.65 LOGIC8-1:LOGIC1_3:K1.A1 | 68.95,40.78 68.95,36.13 LOGIC8-1:LOGIC1_2:D2.C | 68.95,40.78 68.95,44.65 LOGIC8-1:LOGIC1_2:K1.A1 | 19.37,40.78 19.37,36.13 LOGIC8-1:LOGIC1_0:D2.C | 19.37,40.78 19.37,44.65 LOGIC8-1:LOGIC1_0:K1.A1 19.37,45.43 21.69,47.75 21.69,96.56 | 44.93,40.78 44.93,36.13 LOGIC8-1:LOGIC1_1:D2.C | 44.93,40.78 44.93,44.65 LOGIC8-1:LOGIC1_1:K1.A1 | 44.93,40.78 19.37,40.78 | 44.93,40.78 68.95,40.78 | 68.95,40.78 92.96,40.78 | 19.37,7.47 19.37,2.82 LOGIC8-1:LOGIC1_0:D4.C | 19.37,7.47 19.37,11.34 LOGIC8-1:LOGIC1_0:K2.A1 | 68.95,7.47 68.95,2.82 LOGIC8-1:LOGIC1_2:D4.C | 68.95,7.47 68.95,11.34 LOGIC8-1:LOGIC1_2:K2.A1 | 44.93,7.47 44.93,2.82 LOGIC8-1:LOGIC1_1:D4.C | 44.93,7.47 44.93,11.34 LOGIC8-1:LOGIC1_1:K2.A1 | 44.93,7.47 68.95,7.47 | 44.93,7.47 19.37,7.47 | 117.75,7.47 117.75,2.82 LOGIC8-1:ENABLE_XOR:D2.C | 117.75,7.47 117.75,11.34 LOGIC8-1:ENABLE_XOR:K1.A1 | 93.74,7.47 93.74,2.82 LOGIC8-1:LOGIC1_3:D4.C | 93.74,7.47 93.74,11.34 LOGIC8-1:LOGIC1_3:K2.A1 | 93.74,7.47 117.75,7.47 | 141.77,7.47 141.77,2.82 LOGIC8-1:ENABLE_OR:D2.C | 141.77,7.47 141.77,11.34 LOGIC8-1:ENABLE_OR:K1.A1 141.77,12.12 143.32,12.12 147.97,16.76 ZERO_DETECT1:D6.C | ZERO_DETECT1:K3.2 154.94,10.57 148.74,16.76 ZERO_DETECT1:D6.C
  Bottom 1.397: 117.75,40.78 117.75,36.13 LOGIC8-1:ENABLE_AND:D2.C | 117.75,40.78 117.75,44.65 LOGIC8-1:ENABLE_AND:K1.A1 | 141,40.78 141,36.13 LOGIC8-1:ENABLE_NOT:D2.C 141,35.36 147.97,28.38 147.97,17.54 ZERO_DETECT1:D6.C | 141,40.78 141,44.65 LOGIC8-1:ENABLE_NOT:K1.A1 141,45.43 143.32,45.43 147.19,49.3 ZERO_DETECT1:D8.C 147.97,50.08 154.94,43.1 ZERO_DETECT1:K4.2 | 141,40.78 117.75,40.78 | 141.77,7.47 117.75,7.47 | 93.74,7.47 68.95,7.47 | 117.75,40.78 92.96,40.78
  pour Bottom (isolate 0.406): 0,110.49 161.29,110.49 161.29,0 0,0
LOGIC8-1:AND0  (via drill 0.25)
  Top 1.397: v54.23,64.8 44.93,55.5 38.73,55.5 37.19,53.95 30.21,53.95 27.11,50.85 19.37,50.85 LOGIC8-1:LOGIC1_0:K1.11
  Bottom 1.397: v54.23,64.8 61.98,64.8 68.17,70.99 68.17,76.42 72.82,81.06 72.82,82.61 74.37,84.16 80.57,84.16 86.77,77.96 86.77,68.67 88.32,67.12 95.29,67.12 103.81,58.6 LOGIC8-1:ENABLE_AND:K1.44
LOGIC8-1:AND1  (via drill 0.25)
  Top 1.397: v53.45,36.91 v53.45,42.33 | v72.05,35.36 72.05,37.68 v73.6,39.23 | v90.64,39.23 90.64,40.78 96.84,46.98 96.84,50.85 95.29,52.4 95.29,53.95 96.84,55.5 105.36,55.5 107.68,57.82 LOGIC8-1:ENABLE_AND:K1.34
  Bottom 1.397: v53.45,42.33 51.13,42.33 44.16,49.3 44.16,50.85 LOGIC8-1:LOGIC1_1:K1.11 | v53.45,36.91 53.45,34.58 54.23,33.81 70.5,33.81 v72.05,35.36 | v90.64,39.23 v73.6,39.23
LOGIC8-1:AND2  (via drill 0.25)
  Top 1.397: v99.94,42.33 98.39,40.78 98.39,29.93 99.16,29.16 100.71,29.16 102.26,30.71 104.58,30.71 106.13,29.16 106.13,23.74 104.58,22.19 103.03,22.19 101.49,20.64 56.55,20.64 51.13,26.06 51.13,33.81 51.91,34.58 51.91,44.65 55,47.75 62.75,47.75 65.85,50.85 68.17,50.85 LOGIC8-1:LOGIC1_2:K1.11
  Bottom 1.397: v99.94,42.33 103.81,42.33 110.78,49.3 110.78,56.27 112.33,57.82 LOGIC8-1:ENABLE_AND:K1.24
LOGIC8-1:AND3
  Top 1.397: LOGIC8-1:LOGIC1_3:K1.11 92.96,51.62 92.96,53.95 103.03,64.02 113.88,64.02 114.66,63.25 114.66,60.92 116.98,58.6 LOGIC8-1:ENABLE_AND:K1.14
LOGIC8-1:ENABLE_AND:D$1
  Bottom 1.397: LOGIC8-1:ENABLE_AND:D1.A 108.27,35.88 112.71,35.88 LOGIC8-1:ENABLE_AND:D2.A
LOGIC8-1:ENABLE_NOT:D$1
  Bottom 1.397: LOGIC8-1:ENABLE_NOT:D1.A 130.81,35.88 135.89,35.88 LOGIC8-1:ENABLE_NOT:D2.A
LOGIC8-1:ENABLE_OR:D$1
  Bottom 1.397: LOGIC8-1:ENABLE_OR:D1.A 131.13,2.86 135.89,2.86 LOGIC8-1:ENABLE_OR:D2.A
LOGIC8-1:ENABLE_XOR:D$1
  Bottom 1.397: LOGIC8-1:ENABLE_XOR:D1.A 109.22,2.86 112.71,2.86 LOGIC8-1:ENABLE_XOR:D2.A
LOGIC8-1:LOGIC1_0:D$1
  Bottom 1.397: LOGIC8-1:LOGIC1_0:D1.A 8.57,35.88 14.29,35.88 LOGIC8-1:LOGIC1_0:D2.A
LOGIC8-1:LOGIC1_0:D$2
  Bottom 1.397: LOGIC8-1:LOGIC1_0:D3.A 8.57,2.86 14.92,2.86 LOGIC8-1:LOGIC1_0:D4.A
LOGIC8-1:LOGIC1_0:N$1  (via drill 0.25)
  Top 1.397: v6.2,49.3 3.1,46.2 3.1,28.38 5.42,26.06 5.42,24.51 LOGIC8-1:LOGIC1_0:K2.44
  Bottom 1.397: v6.2,49.3 7.75,50.85 7.75,52.4 10.85,55.5 16.27,55.5 18.59,57.82 LOGIC8-1:LOGIC1_0:K1.14
LOGIC8-1:LOGIC1_0:N$3
  Bottom 1.397: LOGIC8-1:LOGIC1_0:K2.24 14.72,24.51 14.72,20.64 16.27,19.09 16.27,16.76 14.72,15.21 10.07,15.21 7.75,17.54 7.75,31.48 3.1,36.13 3.1,52.4 7.75,57.05 7.75,60.15 9.3,61.7 LOGIC8-1:LOGIC1_0:K1.32
LOGIC8-1:LOGIC1_0:N$4
  Top 1.397: LOGIC8-1:LOGIC1_0:K2.22 13.95,29.16 13.95,33.03 8.52,38.46 8.52,50.08 7.75,50.85 7.75,56.27 9.3,57.82 LOGIC8-1:LOGIC1_0:K1.34
LOGIC8-1:LOGIC1_1:D$1
  Bottom 1.397: LOGIC8-1:LOGIC1_1:D1.A 33.66,35.88 40.01,35.88 LOGIC8-1:LOGIC1_1:D2.A
LOGIC8-1:LOGIC1_1:D$2
  Bottom 1.397: LOGIC8-1:LOGIC1_1:D3.A 33.66,2.86 40.01,2.86 LOGIC8-1:LOGIC1_1:D4.A
LOGIC8-1:LOGIC1_1:N$1  (via drill 0.25)
  Top 1.397: v26.34,47.75 26.34,29.16 LOGIC8-1:LOGIC1_1:K2.44
  Bottom 1.397: v26.34,47.75 26.34,60.15 30.21,64.02 40.28,64.02 41.83,62.47 41.83,60.92 44.16,58.6 LOGIC8-1:LOGIC1_1:K1.14
LOGIC8-1:LOGIC1_1:N$3  (via drill 0.25)
  Top 1.397: v39.51,42.33 39.51,40.78 42.61,37.68 42.61,35.36 41.83,34.58 41.83,27.61 40.28,26.06 40.28,24.51 LOGIC8-1:LOGIC1_1:K2.24 | v33.31,57.05 33.31,60.15 34.86,61.7 LOGIC8-1:LOGIC1_1:K1.32
  Bottom 1.397: v39.51,42.33 30.99,42.33 27.89,45.43 27.89,51.62 v33.31,57.05
LOGIC8-1:LOGIC1_1:N$4  (via drill 0.25)
  Top 1.397: v29.44,46.98 28.66,46.2 28.66,35.36 v31.76,32.26
  Bottom 1.397: v29.44,46.98 33.31,50.85 33.31,52.4 34.86,53.95 34.86,57.82 LOGIC8-1:LOGIC1_1:K1.34 | v31.76,32.26 36.41,32.26 39.51,29.16 LOGIC8-1:LOGIC1_1:K2.22
LOGIC8-1:LOGIC1_2:D$1
  Bottom 1.397: LOGIC8-1:LOGIC1_2:D1.A 58.1,35.88 64.14,35.88 LOGIC8-1:LOGIC1_2:D2.A
LOGIC8-1:LOGIC1_2:D$2
  Bottom 1.397: LOGIC8-1:LOGIC1_2:D3.A 58.1,2.86 64.14,2.86 LOGIC8-1:LOGIC1_2:D4.A
LOGIC8-1:LOGIC1_2:N$1  (via drill 0.25)
  Top 1.397: v52.68,33.03 52.68,28.38 55,26.06 55,24.51 LOGIC8-1:LOGIC1_2:K2.44 | v56.55,42.33 v56.55,39.23 | v61.98,52.4 68.17,58.6 LOGIC8-1:LOGIC1_2:K1.14
  Bottom 1.397: v52.68,33.03 51.91,33.81 51.91,37.68 53.45,39.23 v56.55,39.23 | v56.55,42.33 60.43,42.33 63.52,45.43 63.52,49.3 61.98,50.85 v61.98,52.4
LOGIC8-1:LOGIC1_2:N$3  (via drill 0.25)
  Top 1.397: v62.75,42.33 61.98,41.55 61.98,35.36 66.62,30.71 66.62,27.61 65.08,26.06 65.08,24.51 LOGIC8-1:LOGIC1_2:K2.24
  Bottom 1.397: v62.75,42.33 65.85,45.43 65.85,53.18 61.98,57.05 61.98,59.37 59.65,61.7 LOGIC8-1:LOGIC1_2:K1.32
LOGIC8-1:LOGIC1_2:N$4  (via drill 0.25)
  Top 1.397: v57.33,43.88 60.43,40.78 60.43,33.03 64.3,29.16 LOGIC8-1:LOGIC1_2:K2.22
  Bottom 1.397: v57.33,43.88 57.33,52.4 58.88,53.95 58.88,57.82 LOGIC8-1:LOGIC1_2:K1.34
LOGIC8-1:LOGIC1_3:D$1
  Bottom 1.397: LOGIC8-1:LOGIC1_3:D1.A 82.55,35.88 88.58,35.88 LOGIC8-1:LOGIC1_3:D2.A
LOGIC8-1:LOGIC1_3:D$2
  Bottom 1.397: LOGIC8-1:LOGIC1_3:D3.A 81.92,2.86 89.22,2.86 LOGIC8-1:LOGIC1_3:D4.A
LOGIC8-1:LOGIC1_3:N$1  (via drill 0.25)
  Top 1.397: v79.79,53.95 75.15,53.95 74.37,53.18 74.37,44.65 75.15,43.88 75.15,38.46 73.6,36.91 73.6,30.71 79.79,24.51 LOGIC8-1:LOGIC1_3:K2.44
  Bottom 1.397: v79.79,53.95 81.34,52.4 81.34,50.85 82.89,49.3 95.29,49.3 98.39,52.4 98.39,53.95 94.51,57.82 92.96,57.82 LOGIC8-1:LOGIC1_3:K1.14
LOGIC8-1:LOGIC1_3:N$3  (via drill 0.25)
  Top 1.397: v82.12,33.81 86.77,29.16 86.77,27.61 88.32,26.06 88.32,24.51 LOGIC8-1:LOGIC1_3:K2.24 | v71.27,53.95 v71.27,39.23 | v71.27,57.05 78.25,64.02 81.34,64.02 82.89,62.47 LOGIC8-1:LOGIC1_3:K1.32
  Bottom 1.397: v82.12,33.81 77.47,33.81 75.92,35.36 75.15,35.36 v71.27,39.23 | v71.27,57.05 v71.27,53.95
LOGIC8-1:LOGIC1_3:N$4  (via drill 0.25)
  Top 1.397: v96.84,53.18 98.39,51.62 98.39,44.65 91.42,37.68 91.42,35.36 89.09,33.03 89.09,29.16 LOGIC8-1:LOGIC1_3:K2.22
  Bottom 1.397: v96.84,53.18 93.74,53.18 91.42,55.5 85.99,55.5 83.67,57.82 LOGIC8-1:LOGIC1_3:K1.34
LOGIC8-1:NOT0  (via drill 0.25)
  Top 1.397: v21.69,43.88 21.69,24.51 17.82,20.64 10.85,20.64 7.75,23.74 7.75,26.84 6.2,28.38 LOGIC8-1:LOGIC1_0:K2.42 | v23.24,76.42 30.99,84.16 30.99,88.81 v34.86,92.69 | v41.83,92.69 44.93,95.78 44.93,98.11 51.13,104.3 v64.3,104.3 | v75.92,105.08 85.22,105.08 98.39,91.91 v98.39,84.16
  Bottom 1.397: v21.69,43.88 21.69,45.43 23.24,46.98 v23.24,76.42 | v41.83,92.69 v34.86,92.69 | v64.3,104.3 65.08,105.08 v75.92,105.08 | v98.39,84.16 105.36,77.19 105.36,67.89 107.68,65.57 120.08,65.57 127.05,58.6 LOGIC8-1:ENABLE_NOT:K1.44
LOGIC8-1:NOT1  (via drill 0.25)
  Top 1.397: v61.2,9.02 75.15,9.02 v78.25,5.92 | v92.19,5.92 94.51,5.92 106.13,17.54 106.13,19.09 107.68,20.64 v117.75,20.64 | v125.5,27.61 125.5,46.2 v128.6,49.3
  Bottom 1.397: v61.2,9.02 56.55,13.66 37.19,13.66 33.31,17.54 33.31,19.09 28.66,23.74 28.66,26.06 30.99,28.38 LOGIC8-1:LOGIC1_1:K2.42 | v92.19,5.92 v78.25,5.92 | v117.75,20.64 118.53,20.64 v125.5,27.61 | v128.6,49.3 129.38,50.08 129.38,51.62 131.7,53.95 131.7,57.82 LOGIC8-1:ENABLE_NOT:K1.34
LOGIC8-1:NOT2  (via drill 0.25)
  Top 1.397: v74.37,26.84 69.72,22.19 59.65,22.19 58.1,23.74 58.1,26.06 55.78,28.38 LOGIC8-1:LOGIC1_2:K2.42 | v77.47,29.93 77.47,43.88 75.92,45.43 v75.92,47.75 | v72.82,67.89 74.37,67.89 80.57,74.09 80.57,74.87 82.89,77.19 84.44,77.19 88.32,81.06 89.86,81.06 91.42,79.52 91.42,77.96 92.96,76.42 102.26,76.42 106.91,71.77 v111.56,71.77
  Bottom 1.397: v77.47,29.93 v74.37,26.84 | v75.92,47.75 72.82,50.85 v72.82,67.89 | v111.56,71.77 116.2,67.12 129.38,67.12 134.02,62.47 134.02,60.92 136.35,58.6 LOGIC8-1:ENABLE_NOT:K1.24
LOGIC8-1:NOT3  (via drill 0.25)
  Top 1.397: v97.61,26.06 93.74,22.19 83.67,22.19 82.12,23.74 82.12,25.29 80.57,26.84 80.57,28.38 LOGIC8-1:LOGIC1_3:K2.42 | v99.94,30.71 103.03,33.81 113.88,33.81 115.43,35.36 115.43,40.78 125.5,50.85 125.5,54.72 126.28,55.5 137.9,55.5 140.22,57.82 LOGIC8-1:ENABLE_NOT:K1.14
  Bottom 1.397: v97.61,26.06 97.61,28.38 v99.94,30.71
LOGIC8-1:OR0  (via drill 0.25)
  Top 1.397: LOGIC8-1:LOGIC1_0:K2.34 11.62,24.51 13.95,22.19 14.72,22.19 16.27,23.74 v16.27,46.98 | v13.95,53.95 13.95,57.82 LOGIC8-1:LOGIC1_0:K1.24 | LOGIC8-1:ENABLE_OR:K1.44 120.08,24.51 117.75,22.19 106.91,22.19 105.36,20.64 103.81,20.64 97.61,14.44 15.49,14.44 v13.17,16.76
  Bottom 1.397: v16.27,46.98 12.39,50.85 12.39,52.4 v13.95,53.95 | v13.17,16.76 12.39,17.54 12.39,22.19 10.07,24.51 LOGIC8-1:LOGIC1_0:K2.34
LOGIC8-1:OR1  (via drill 0.25)
  Top 1.397: v24.79,47.75 24.79,27.61 30.21,22.19 32.54,22.19 34.86,24.51 LOGIC8-1:LOGIC1_1:K2.34 | v24.79,52.4 26.34,52.4 29.44,55.5 36.41,55.5 39.51,58.6 LOGIC8-1:LOGIC1_1:K1.24 | v123.95,17.54 121.63,17.54 117.75,13.66 v104.58,13.66
  Bottom 1.397: v24.79,52.4 v24.79,47.75 | LOGIC8-1:ENABLE_OR:K1.34 130.92,24.51 v123.95,17.54 | v104.58,13.66 84.44,13.66 80.57,9.79 73.6,9.79 69.72,13.66 58.88,13.66 56.55,15.99 50.35,15.99 44.16,22.19 37.96,22.19 35.64,24.51 LOGIC8-1:LOGIC1_1:K2.34
LOGIC8-1:OR2  (via drill 0.25)
  Top 1.397: v77.47,65.57 76.69,64.8 68.17,64.8 65.85,62.47 65.85,60.15 64.3,58.6 LOGIC8-1:LOGIC1_2:K1.24 | v99.94,49.3 99.94,44.65 103.03,41.55 v103.03,35.36
  Bottom 1.397: 116.59,21.8 116.98,22.19 117.75,22.19 126.28,30.71 133.25,30.71 134.8,29.16 134.8,26.06 136.35,24.51 LOGIC8-1:ENABLE_OR:K1.24 | 116.59,21.8 115.43,20.64 103.81,20.64 99.16,15.99 79.02,15.99 74.37,20.64 64.3,20.64 60.43,24.51 LOGIC8-1:LOGIC1_2:K2.34 | v77.47,65.57 91.42,65.57 99.94,57.05 v99.94,49.3 | v103.03,35.36 104.58,33.81 110.78,33.81 114.66,29.93 114.66,23.74 116.59,21.8
LOGIC8-1:OR3  (via drill 0.25)
  Top 1.397: v87.54,30.71 87.54,33.81 85.99,35.36 85.99,46.2 81.34,50.85 81.34,53.18 v82.12,53.95 | v120.85,32.26 108.46,32.26 v106.91,30.71
  Bottom 1.397: 84.44,24.51 84.44,26.06 86.77,28.38 86.77,29.93 v87.54,30.71 | v82.12,53.95 82.12,56.27 81.34,57.05 81.34,62.47 82.89,64.02 84.44,64.02 85.99,62.47 85.99,60.15 87.54,58.6 LOGIC8-1:LOGIC1_3:K1.24 | v120.85,32.26 136.35,32.26 139.45,29.16 139.45,27.61 141,26.06 141,24.51 LOGIC8-1:ENABLE_OR:K1.14 | v106.91,30.71 103.03,30.71 99.16,26.84 99.16,25.29 96.06,22.19 86.77,22.19 84.44,24.51 | 84.44,24.51 LOGIC8-1:LOGIC1_3:K2.34
LOGIC8-1:XOR0  (via drill 0.25)
  Top 1.397: v43.38,39.23 45.71,39.23 49.58,35.36 v50.35,35.36 | v75.15,33.81 75.15,36.13 v75.92,36.91 | v87.54,37.68 88.32,38.46 89.09,38.46 v89.86,37.68 | v92.19,33.81 101.49,24.51 LOGIC8-1:ENABLE_XOR:K1.44
  Bottom 1.397: v43.38,39.23 31.76,39.23 26.34,33.81 18.59,33.81 17.04,35.36 17.04,36.13 10.07,43.1 10.07,50.85 LOGIC8-1:LOGIC1_0:K1.31 | v50.35,35.36 50.35,33.03 51.91,31.48 53.45,31.48 54.23,32.26 71.27,32.26 72.82,33.81 v75.15,33.81 | v75.92,36.91 78.25,36.91 79.02,37.68 v87.54,37.68 | v89.86,37.68 90.64,36.91 90.64,35.36 v92.19,33.81
LOGIC8-1:XOR1  (via drill 0.25)
  Top 1.397: v35.64,33.81 v35.64,47.75
  Bottom 1.397: v35.64,47.75 35.64,50.85 LOGIC8-1:LOGIC1_1:K1.31 | v35.64,33.81 44.16,33.81 48.03,29.93 54.23,29.93 55,30.71 69.72,30.71 72.82,27.61 72.82,26.06 78.25,20.64 101.49,20.64 103.03,22.19 105.36,22.19 107.68,24.51 LOGIC8-1:ENABLE_XOR:K1.34
LOGIC8-1:XOR2  (via drill 0.25)
  Top 1.397: v72.05,30.71 68.95,33.81 68.17,33.81 66.62,35.36 66.62,41.55 v61.98,46.2
  Bottom 1.397: v72.05,30.71 73.6,32.26 88.32,32.26 89.86,30.71 97.61,30.71 99.16,32.26 107.68,32.26 110.78,29.16 110.78,27.61 112.33,26.06 112.33,24.51 LOGIC8-1:ENABLE_XOR:K1.24 | v61.98,46.2 61.98,48.53 59.65,50.85 LOGIC8-1:LOGIC1_2:K1.31
LOGIC8-1:XOR3  (via drill 0.25)
  Top 1.397: v104.58,47.75 v113.11,39.23 | v95.29,47.75 86.77,47.75 83.67,50.85 LOGIC8-1:LOGIC1_3:K1.31
  Bottom 1.397: v113.11,39.23 115.43,36.91 115.43,35.36 119.3,31.48 119.3,27.61 117.75,26.06 117.75,24.51 LOGIC8-1:ENABLE_XOR:K1.14 | v95.29,47.75 v104.58,47.75
LUE
  Top 1.397: ENABLE_A:D1.C 25.57,92.69 23.24,92.69 19.37,88.81 ENABLE_A:K1.A2 | 61.2,98.88 65.85,103.53 | 61.2,98.88 59.65,98.88 54.23,93.46 ENABLE_B:D1.C | 61.2,98.88 INPUT_OP:LED2.A | 107.68,98.11 107.68,94.23 ENABLE4-3:D1.C | 107.68,98.11 115.43,105.85 122.4,105.85 128.6,99.66 128.6,88.81 ENABLE4-3:K1.A2 | 65.85,103.53 65.85,104.3 68.17,106.63 99.16,106.63 107.68,98.11 | 65.85,103.53 INPUT_OP:X1.1
  Bottom 1.397: ENABLE_B:D1.C 53.45,92.69 51.13,92.69 47.26,88.81 ENABLE_B:K1.A2 46.48,88.04 44.16,85.71 33.31,85.71 27.89,80.29 25.57,80.29 24.02,81.84 24.02,91.13 25.57,92.69 ENABLE_A:D1.C | ENABLE4-4:D1.C 134.8,93.46 133.25,93.46 128.6,88.81 ENABLE4-3:K1.A2 127.83,88.04 134.02,81.84 138.67,81.84 144.87,88.04 154.94,88.04 ENABLE4-4:K1.A2
N$1
  Top 1.397: 32.15,99.27 32.54,98.88 INPUT_A:LED0.A | 32.15,99.27 27.89,103.53 INPUT_A:X1.4 | 32.15,99.27 29.44,96.56 29.44,88.04 27.11,85.71 26.34,85.71 19.37,78.74 19.37,75.64 ENABLE_A:K1.44
N$2  (via drill 0.25)
  Top 1.397: INPUT_A:X1.3 25.57,103.53 25.57,102.76 27.11,101.21 27.11,99.66 INPUT_A:LED1.A 27.11,98.88 23.24,95.01 22.47,95.01 v16.27,88.81 | v16.27,81.84 16.27,81.06 14.72,79.52 14.72,75.64 ENABLE_A:K1.34
  Bottom 1.397: v16.27,88.81 v16.27,81.84
N$3
  Bottom 1.397: 22.85,100.04 22.47,99.66 INPUT_A:LED2.A | 22.85,100.04 23.24,100.43 23.24,103.53 INPUT_A:X1.2 | 22.85,100.04 18.59,104.3 6.2,104.3 3.1,101.21 3.1,81.06 4.65,79.52 5.42,79.52 9.3,75.64 ENABLE_A:K1.24
N$4
  Top 1.397: 21.69,103.53 17.04,98.88 INPUT_A:LED3.A | 21.69,103.53 23.24,105.08 23.24,106.63 22.47,107.4 9.3,107.4 3.1,101.21 3.1,81.06 5.42,78.74 5.42,75.64 ENABLE_A:K1.14 | 21.69,103.53 INPUT_A:X1.1
N$5
  Top 1.397: ENABLE_B:K1.44 47.26,75.64 47.26,77.19 50.35,80.29 50.35,95.78 53.45,98.88 INPUT_B:LED0.A
  Bottom 1.397: INPUT_B:X1.4 48.03,103.53 49.58,103.53 53.45,99.66 INPUT_B:LED0.A
N$6
  Top 1.397: ENABLE_B:K1.34 42.61,75.64 42.61,79.52 44.16,81.06 44.16,92.69 46.48,95.01 46.48,97.33 48.03,98.88 INPUT_B:LED1.A
  Bottom 1.397: INPUT_B:X1.3 45.71,103.53 45.71,101.98 48.03,99.66 INPUT_B:LED1.A
N$7  (via drill 0.25)
  Top 1.397: 44.16,103.53 44.16,100.43 43.38,99.66 INPUT_B:LED2.A | v34.09,84.16 34.09,85.71 36.41,88.04 36.41,93.46 34.86,95.01 34.86,98.88 41.83,105.85 42.61,105.85 44.16,104.3 44.16,103.53 | 44.16,103.53 INPUT_B:X1.2
  Bottom 1.397: v34.09,84.16 35.64,82.61 35.64,81.06 37.19,79.52 37.19,75.64 ENABLE_B:K1.24
N$8
  Top 1.397: INPUT_B:X1.1 41.83,103.53 37.96,99.66 INPUT_B:LED3.A 37.96,98.88 36.41,97.33 36.41,95.78 37.96,94.23 37.96,87.26 35.64,84.94 35.64,78.74 34.09,77.19 34.09,75.64 ENABLE_B:K1.14
N$9  (via drill 0.25)
  Top 1.397: LOGIC8-1:LOGIC1_3:D1.C 79.79,36.13 79.79,39.23 79.02,40.01 79.02,44.65 LOGIC8-1:LOGIC1_3:K1.A2 79.02,45.43 79.02,46.98 75.92,50.08 v75.92,52.4 | v75.92,66.34 53.45,66.34 51.91,67.89 34.09,67.89 30.99,70.99 30.99,76.42 33.31,78.74 33.31,81.84 ENABLE_B:K1.11
  Bottom 1.397: v75.92,52.4 v75.92,66.34
N$10
  Top 1.397: LOGIC8-1:LOGIC1_2:D1.C 55,36.13 55,44.65 LOGIC8-1:LOGIC1_2:K1.A2
  Bottom 1.397: ENABLE_B:K1.21 37.96,82.61 40.28,82.61 41.83,84.16 47.26,84.16 50.35,81.06 50.35,50.08 55,45.43 LOGIC8-1:LOGIC1_2:K1.A2
N$11  (via drill 0.25)
  Top 1.397: LOGIC8-1:LOGIC1_1:D1.C 30.99,44.65 LOGIC8-1:LOGIC1_1:K1.A2 | v48.81,57.05 45.71,53.95 v39.51,53.95
  Bottom 1.397: v48.81,57.05 48.81,76.42 47.26,77.96 46.48,77.96 42.61,81.84 ENABLE_B:K1.31 | v39.51,53.95 37.96,52.4 37.96,47.75 35.64,45.43 31.76,45.43 LOGIC8-1:LOGIC1_1:K1.A2
N$12  (via drill 0.25)
  Top 1.397: LOGIC8-1:LOGIC1_0:D1.C 6.2,36.13 6.2,44.65 LOGIC8-1:LOGIC1_0:K1.A2 | v44.16,76.42 46.48,78.74 46.48,81.84 ENABLE_B:K1.41 | v49.58,37.68 v49.58,46.2 | v48.81,31.48 48.81,26.06 v43.38,20.64
  Bottom 1.397: v44.16,76.42 44.16,70.99 47.26,67.89 47.26,48.53 v49.58,46.2 | v49.58,37.68 49.58,36.91 48.81,36.13 v48.81,31.48 | v43.38,20.64 36.41,20.64 33.31,23.74 33.31,29.16 31.76,30.71 10.85,30.71 6.2,35.36 LOGIC8-1:LOGIC1_0:D1.C
N$13
  Top 1.397: 2-4_DECODER:D1.C 88.32,94.23 82.89,94.23 2-4_DECODER:K1.1 82.12,94.23 79.79,94.23 75.15,98.88 | 75.15,98.88 70.5,103.53 INPUT_OP:X1.3 | 75.15,98.88 INPUT_OP:LED0.A
N$14  (via drill 0.25)
  Top 1.397: LOGIC8-1:LOGIC1_3:D3.C 79.79,2.82 79.79,11.34 LOGIC8-1:LOGIC1_3:K2.A2 | v17.82,95.01 20.14,97.33 20.14,99.66 21.69,101.21 v24.79,101.21 | v40.28,69.44 v40.28,99.66 | v41.83,57.05 v41.83,64.8 | v41.83,44.65 45.71,40.78 46.48,40.78 v48.03,39.23 | v47.26,28.38 v47.26,33.03
  Bottom 1.397: v17.82,95.01 5.42,82.61 ENABLE_A:K1.11 | v24.79,101.21 38.73,101.21 v40.28,99.66 | v40.28,69.44 40.28,66.34 v41.83,64.8 | v41.83,44.65 v41.83,57.05 | v48.03,39.23 48.03,37.68 47.26,36.91 v47.26,33.03 | v47.26,28.38 48.81,28.38 58.1,19.09 58.1,17.54 60.43,15.21 76.69,15.21 79.79,12.12 LOGIC8-1:LOGIC1_3:K2.A2
N$15
  Top 1.397: 55.78,9.79 55.78,11.34 LOGIC8-1:LOGIC1_2:K2.A2 | 55.78,9.79 55.78,2.82 LOGIC8-1:LOGIC1_2:D3.C | 55.78,9.79 10.85,9.79 1.55,19.09 1.55,60.92 7.75,67.12 7.75,76.42 9.3,77.96 9.3,81.84 ENABLE_A:K1.21
N$16  (via drill 0.25)
  Top 1.397: v17.82,8.24 23.24,2.82 30.99,2.82 LOGIC8-1:LOGIC1_1:D3.C | v21.69,105.85 14.72,98.88 14.72,82.61 ENABLE_A:K1.31 | v63.52,98.11 63.52,95.01 54.23,85.71 53.45,85.71 51.91,84.16 51.91,74.09 47.26,69.44 v43.38,69.44 | v43.38,66.34 30.99,66.34 v17.04,52.4 | v19.37,47.75 21.69,45.43 22.47,45.43 23.24,44.65 v23.24,17.54
  Bottom 1.397: v17.82,8.24 17.82,9.79 16.27,11.34 16.27,12.12 17.82,13.66 23.24,13.66 | 23.24,13.66 29.44,13.66 30.99,12.12 LOGIC8-1:LOGIC1_1:K2.A2 | v21.69,105.85 57.33,105.85 63.52,99.66 v63.52,98.11 | v43.38,66.34 v43.38,69.44 | v17.04,52.4 16.27,51.62 16.27,50.85 v19.37,47.75 | 23.24,13.66 v23.24,17.54
N$17
  Top 1.397: LOGIC8-1:LOGIC1_0:D3.C 6.2,2.82 6.2,11.34 LOGIC8-1:LOGIC1_0:K2.A2
  Bottom 1.397: ENABLE_A:K1.41 18.59,81.84 14.72,77.96 13.95,77.96 12.39,76.42 12.39,70.99 5.42,64.02 4.65,64.02 1.55,60.92 1.55,15.99 5.42,12.12 LOGIC8-1:LOGIC1_0:K2.A2
N$18
  Top 1.397: INPUT_OP:X1.2 68.17,103.53 68.17,99.66 INPUT_OP:LED1.A 67.4,98.88 65.85,97.33 65.85,95.01 59.65,88.81 59.65,84.94 54.23,79.52 2-4_DECODER:D3.C
  Bottom 1.397: 2-4_DECODER:K2.A2 74.37,88.04 68.95,88.04 64.3,83.39 64.3,81.06 58.1,74.87 58.1,69.44 55,66.34 53.45,66.34 51.91,67.89 51.91,76.42 54.23,78.74 2-4_DECODER:D3.C
N$19  (via drill 0.25)  (1 unrouted)
  Top 1.397: LOGIC8-1:ENABLE_NOT:D1.C 127.83,36.13 127.83,44.65 LOGIC8-1:ENABLE_NOT:K1.A2 | v80.57,42.33 80.57,40.78 84.44,36.91 v84.44,33.81 | v106.91,42.33 v106.91,39.23
  Bottom 1.397: 70.5,70.99 70.5,67.12 65.85,62.47 65.85,57.05 71.27,51.62 71.27,50.08 79.02,42.33 v80.57,42.33 | v84.44,33.81 89.86,33.81 91.42,32.26 96.84,32.26 103.81,39.23 v106.91,39.23 | v106.91,42.33 111.56,42.33 116.98,47.75 124.73,47.75 127.05,45.43 LOGIC8-1:ENABLE_NOT:K1.A2
N$20
  Top 1.397: LOGIC8-1:ENABLE_AND:D1.C 105.36,36.13 105.36,43.88 104.58,44.65 LOGIC8-1:ENABLE_AND:K1.A2
  Bottom 1.397: 2-4_DECODER:K2.34 71.27,75.64 71.27,74.09 72.82,72.54 72.82,70.22 74.37,68.67 74.37,51.62 78.25,47.75 92.96,47.75 95.29,45.43 103.81,45.43 LOGIC8-1:ENABLE_AND:K1.A2
N$21  (via drill 0.25)
  Top 1.397: 128.6,5.14 128.6,11.34 LOGIC8-1:ENABLE_OR:K1.A2 | 128.6,5.14 128.6,2.82 LOGIC8-1:ENABLE_OR:D1.C | v86.77,91.13 v75.15,79.52 | v149.52,3.59 143.32,3.59 141.77,5.14 128.6,5.14
  Bottom 1.397: v75.15,79.52 77.47,77.19 77.47,74.09 75.15,71.77 2-4_DECODER:K2.42 | v86.77,91.13 86.77,95.01 97.61,105.85 124.73,105.85 126.28,104.3 141.77,104.3 143.32,105.85 150.29,105.85 158.81,97.33 158.81,11.34 155.72,8.24 154.16,8.24 v149.52,3.59
N$22  (via drill 0.25)  (1 unrouted)
  Top 1.397: 106.13,9.79 106.13,2.82 LOGIC8-1:ENABLE_XOR:D1.C | 106.13,9.79 104.58,11.34 LOGIC8-1:ENABLE_XOR:K1.A2 | 74.37,75.64 68.17,81.84 68.17,94.23 v72.82,98.88 | v127.05,105.85 127.05,103.53 132.47,98.11 132.47,76.42 141,67.89 v141,65.57 | v142.54,57.05 142.54,49.3 144.09,47.75 v144.09,18.31 | 106.13,9.79 v119.3,9.79
  Bottom 1.397: v72.82,98.88 72.82,99.66 80.57,107.4 125.5,107.4 v127.05,105.85 | v141,65.57 142.54,64.02 v142.54,57.05 | v144.09,18.31 135.57,9.79 v119.3,9.79
N$26
  Bottom 1.397: ENABLE4-3:K1.44 128.6,75.64 134.02,75.64 154.94,54.72 ZERO_DETECT1:K4.3
N$40  (via drill 0.25)
  Top 1.397: v107.68,15.99 117.75,15.99 120.85,19.09 127.05,19.09 127.83,18.31 LOGIC8-1:ENABLE_OR:K1.41 | ZERO_DETECT1:K4.1 154.94,39.23 147.97,39.23 ZERO_DETECT1:D7.C 147.19,39.23 146.81,39.62 | v149.52,53.95 152.62,57.05 152.62,72.54 154.94,74.87 ENABLE4-4:K1.44 | v145.64,50.08 145.64,40.78 146.81,39.62 | v146.42,26.84 146.42,39.23 146.81,39.62 | v142.54,46.98 141.77,47.75 132.47,47.75 129.38,50.85 127.83,50.85 LOGIC8-1:ENABLE_NOT:K1.41
  Bottom 1.397: LOGIC8-1:ENABLE_AND:K1.41 104.58,51.62 104.58,55.5 106.13,57.05 106.13,62.47 107.68,64.02 118.53,64.02 127.05,55.5 127.83,55.5 128.6,54.72 128.6,53.18 127.05,51.62 LOGIC8-1:ENABLE_NOT:K1.41 | v107.68,15.99 106.13,17.54 104.58,17.54 LOGIC8-1:ENABLE_XOR:K1.41 | v149.52,53.95 v145.64,50.08 v142.54,46.98 | v146.42,26.84 141.77,22.19 132.47,22.19 128.6,18.31 LOGIC8-1:ENABLE_OR:K1.41
N$41  (via drill 0.25)
  Top 1.397: LOGIC8-1:ENABLE_OR:K1.31 132.47,17.54 144.09,5.92 147.97,5.92 ZERO_DETECT1:D5.C 148.74,5.92 154.94,5.92 ZERO_DETECT1:K3.1 155.72,6.69 155.72,8.24 158.81,11.34 158.81,74.87 155.72,77.96 153.39,77.96 151.07,75.64 ENABLE4-4:K1.34 | v134.02,57.05 134.02,62.47 132.47,64.02 126.28,64.02 125.5,63.25 125.5,57.05 117.75,49.3 112.33,49.3 110.78,50.85 108.46,50.85 LOGIC8-1:ENABLE_AND:K1.31
  Bottom 1.397: LOGIC8-1:ENABLE_XOR:K1.31 108.46,17.54 110.78,17.54 113.88,14.44 129.38,14.44 132.47,17.54 LOGIC8-1:ENABLE_OR:K1.31 | 134.02,55.5 134.02,53.18 132.47,51.62 LOGIC8-1:ENABLE_NOT:K1.31 | 134.02,55.5 v134.02,57.05 | 134.02,55.5 137.12,55.5 138.67,57.05 138.67,62.47 132.47,68.67 123.18,68.67 121.63,70.22 121.63,76.42 124.73,79.52 146.42,79.52 150.29,75.64 ENABLE4-4:K1.34
N$42  (via drill 0.25)
  Top 1.397: v128.6,15.99 131.7,15.99 v132.47,15.21 | v86.77,84.16 89.09,86.49 89.86,86.49 91.42,88.04 91.42,91.13 92.96,92.69 92.96,94.23 ZERO_DETECT1:K2.1 | v127.05,53.95 133.25,53.95 135.57,51.62 LOGIC8-1:ENABLE_NOT:K1.21 | v148.74,58.6 148.74,72.54 146.42,74.87 ENABLE4-4:K1.24 145.64,75.64 137.12,84.16 137.12,98.11 127.83,107.4 114.66,107.4 111.56,104.3 v103.81,104.3 | v139.45,20.64 139.45,34.58 138.67,35.36 v138.67,46.2
  Bottom 1.397: v128.6,15.99 116.2,15.99 114.66,17.54 113.11,17.54 LOGIC8-1:ENABLE_XOR:K1.21 | v132.47,15.21 134.02,15.21 136.35,17.54 LOGIC8-1:ENABLE_OR:K1.21 137.12,18.31 v139.45,20.64 | v86.77,84.16 86.77,81.84 89.09,79.52 ZERO_DETECT1:D3.C | v127.05,53.95 116.98,53.95 114.66,51.62 113.11,51.62 LOGIC8-1:ENABLE_AND:K1.21 | v148.74,58.6 146.42,58.6 142.16,54.34 | 142.16,54.34 141.77,53.95 138.67,53.95 136.35,51.62 LOGIC8-1:ENABLE_NOT:K1.21 | v103.81,104.3 93.74,94.23 ZERO_DETECT1:K2.1 | v138.67,46.2 142.54,50.08 142.54,53.95 142.16,54.34
N$43  (via drill 0.25)
  Top 1.397: 134.8,20.64 137.12,20.64 139.45,18.31 141,18.31 LOGIC8-1:ENABLE_OR:K1.11 | 134.8,20.64 120.08,20.64 117.75,18.31 LOGIC8-1:ENABLE_XOR:K1.11 | 134.8,20.64 134.8,33.81 133.25,35.36 v133.25,46.2 | v103.03,83.39 103.03,90.36 100.71,92.69 100.71,94.23 ZERO_DETECT1:K1.1 | 121.63,75.64 123.18,75.64 ENABLE4-3:K1.34 | 121.63,75.64 119.3,77.96 109.23,77.96 107.68,79.52 ZERO_DETECT1:D1.C | 121.63,75.64 121.63,59.37 117.75,55.5 117.75,51.62 LOGIC8-1:ENABLE_AND:K1.11
  Bottom 1.397: 133.25,47.75 137.12,47.75 140.22,50.85 LOGIC8-1:ENABLE_NOT:K1.11 | 133.25,47.75 127.83,47.75 124.73,50.85 117.75,50.85 LOGIC8-1:ENABLE_AND:K1.11 | 133.25,47.75 v133.25,46.2 | v103.03,83.39 106.91,79.52 ZERO_DETECT1:D1.C | ENABLE4-4:K1.14 141.77,75.64 136.35,75.64 134.02,77.96 126.28,77.96 123.95,75.64 ENABLE4-3:K1.34
OVERFLOW
  Top 1.397: OUTPUT4-2:X1.2 117.75,103.53 117.75,101.21 116.2,99.66 OUTPUT4-2:LED2.A 116.2,98.88 118.53,96.56 118.53,82.61 ENABLE4-3:K1.21
R0
  Top 1.397: ENABLE4-4:K1.41 154.94,82.61 154.94,85.71 152.62,88.04 152.62,97.33 154.16,98.88 OUTPUT4-1:LED0.A
  Bottom 1.397: OUTPUT4-1:X1.4 149.52,103.53 154.16,98.88 OUTPUT4-1:LED0.A
R1
  Top 1.397: OUTPUT4-1:X1.3 147.97,103.53 147.97,99.66 148.74,98.88 OUTPUT4-1:LED1.A 149.52,98.88 151.07,97.33 151.07,82.61 ENABLE4-4:K1.31
R2
  Top 1.397: OUTPUT4-1:X1.2 145.64,103.53 145.64,101.21 144.09,99.66 OUTPUT4-1:LED2.A 144.09,98.88 146.42,96.56 146.42,82.61 ENABLE4-4:K1.21
R3
  Top 1.397: OUTPUT4-1:X1.1 143.32,103.53 138.67,98.88 OUTPUT4-1:LED3.A 139.45,98.88 144.09,94.23 144.09,87.26 142.54,85.71 142.54,82.61 ENABLE4-4:K1.11
SIGN
  Top 1.397: OUTPUT4-2:X1.3 120.08,103.53 120.08,99.66 120.85,98.88 OUTPUT4-2:LED1.A 121.63,98.88 123.18,97.33 123.18,82.61 ENABLE4-3:K1.31
ZERO
  Top 1.397: ENABLE4-3:K1.41 127.83,82.61 127.83,85.71 124.73,88.81 124.73,97.33 126.28,98.88 OUTPUT4-2:LED0.A
  Bottom 1.397: OUTPUT4-2:X1.4 121.63,103.53 126.28,98.88 OUTPUT4-2:LED0.A
ZERO_DETECT1:D$1
  Bottom 1.397: ZERO_DETECT1:D2.A ZERO_DETECT1:D1.A
ZERO_DETECT1:D$2
  Bottom 1.397: ZERO_DETECT1:D3.A 89.22,76.83 89.22,74.3 ZERO_DETECT1:D4.A
ZERO_DETECT1:D$3
  Bottom 1.397: ZERO_DETECT1:D6.A ZERO_DETECT1:D5.A
ZERO_DETECT1:D$4
  Bottom 1.397: ZERO_DETECT1:D8.A ZERO_DETECT1:D7.A
ZERO_DETECT1:N$2
  Bottom 1.397: ZERO_DETECT1:K2.4 93.74,74.87 96.06,74.87 99.94,78.74 ZERO_DETECT1:K1.3
ZERO_DETECT1:N$3
  Top 1.397: ZERO_DETECT1:K2.3 93.74,79.52 97.61,79.52 99.94,81.84 111.56,81.84 113.88,79.52 127.05,79.52 139.45,67.12 139.45,64.8 140.22,64.02 141.77,64.02 147.19,58.6 147.19,53.18 157.26,43.1 157.26,28.38 155.72,26.84 ZERO_DETECT1:K3.4
ZERO_DETECT1:N$4
  Bottom 1.397: ZERO_DETECT1:K3.3 155.72,22.19 155.72,24.51 157.26,26.06 157.26,57.05 155.72,58.6 ZERO_DETECT1:K4.4

## Text on the board
tPlace: A3 | A2 | A1 | A0 | B3 | B2 | B1 | B0 | LUE | OP1 | OP0 | CRRY | OVER | SIGN | ZERO | R3 | R2 | R1 | R0 | 12VDC | LOGIC UNIT REV A | GND
bPlace: JAKE KARNES | OCTOBER 2017